# Altium PCB PCB3.PcbDoc (part 1 of 4)
Units mm, origin at the board's own origin, x right, y up, seen from the top; angles counter-clockwise.
Board outline 130 x 71 mm, 4 copper layers (Top Layer, Mid Layer 1, Mid Layer 2, Bottom Layer), stack 1.57 mm thick; 325 components, 359 nets, 1545 pads, 1046 vias.
Unrouted connection lines stored in the file: 158.
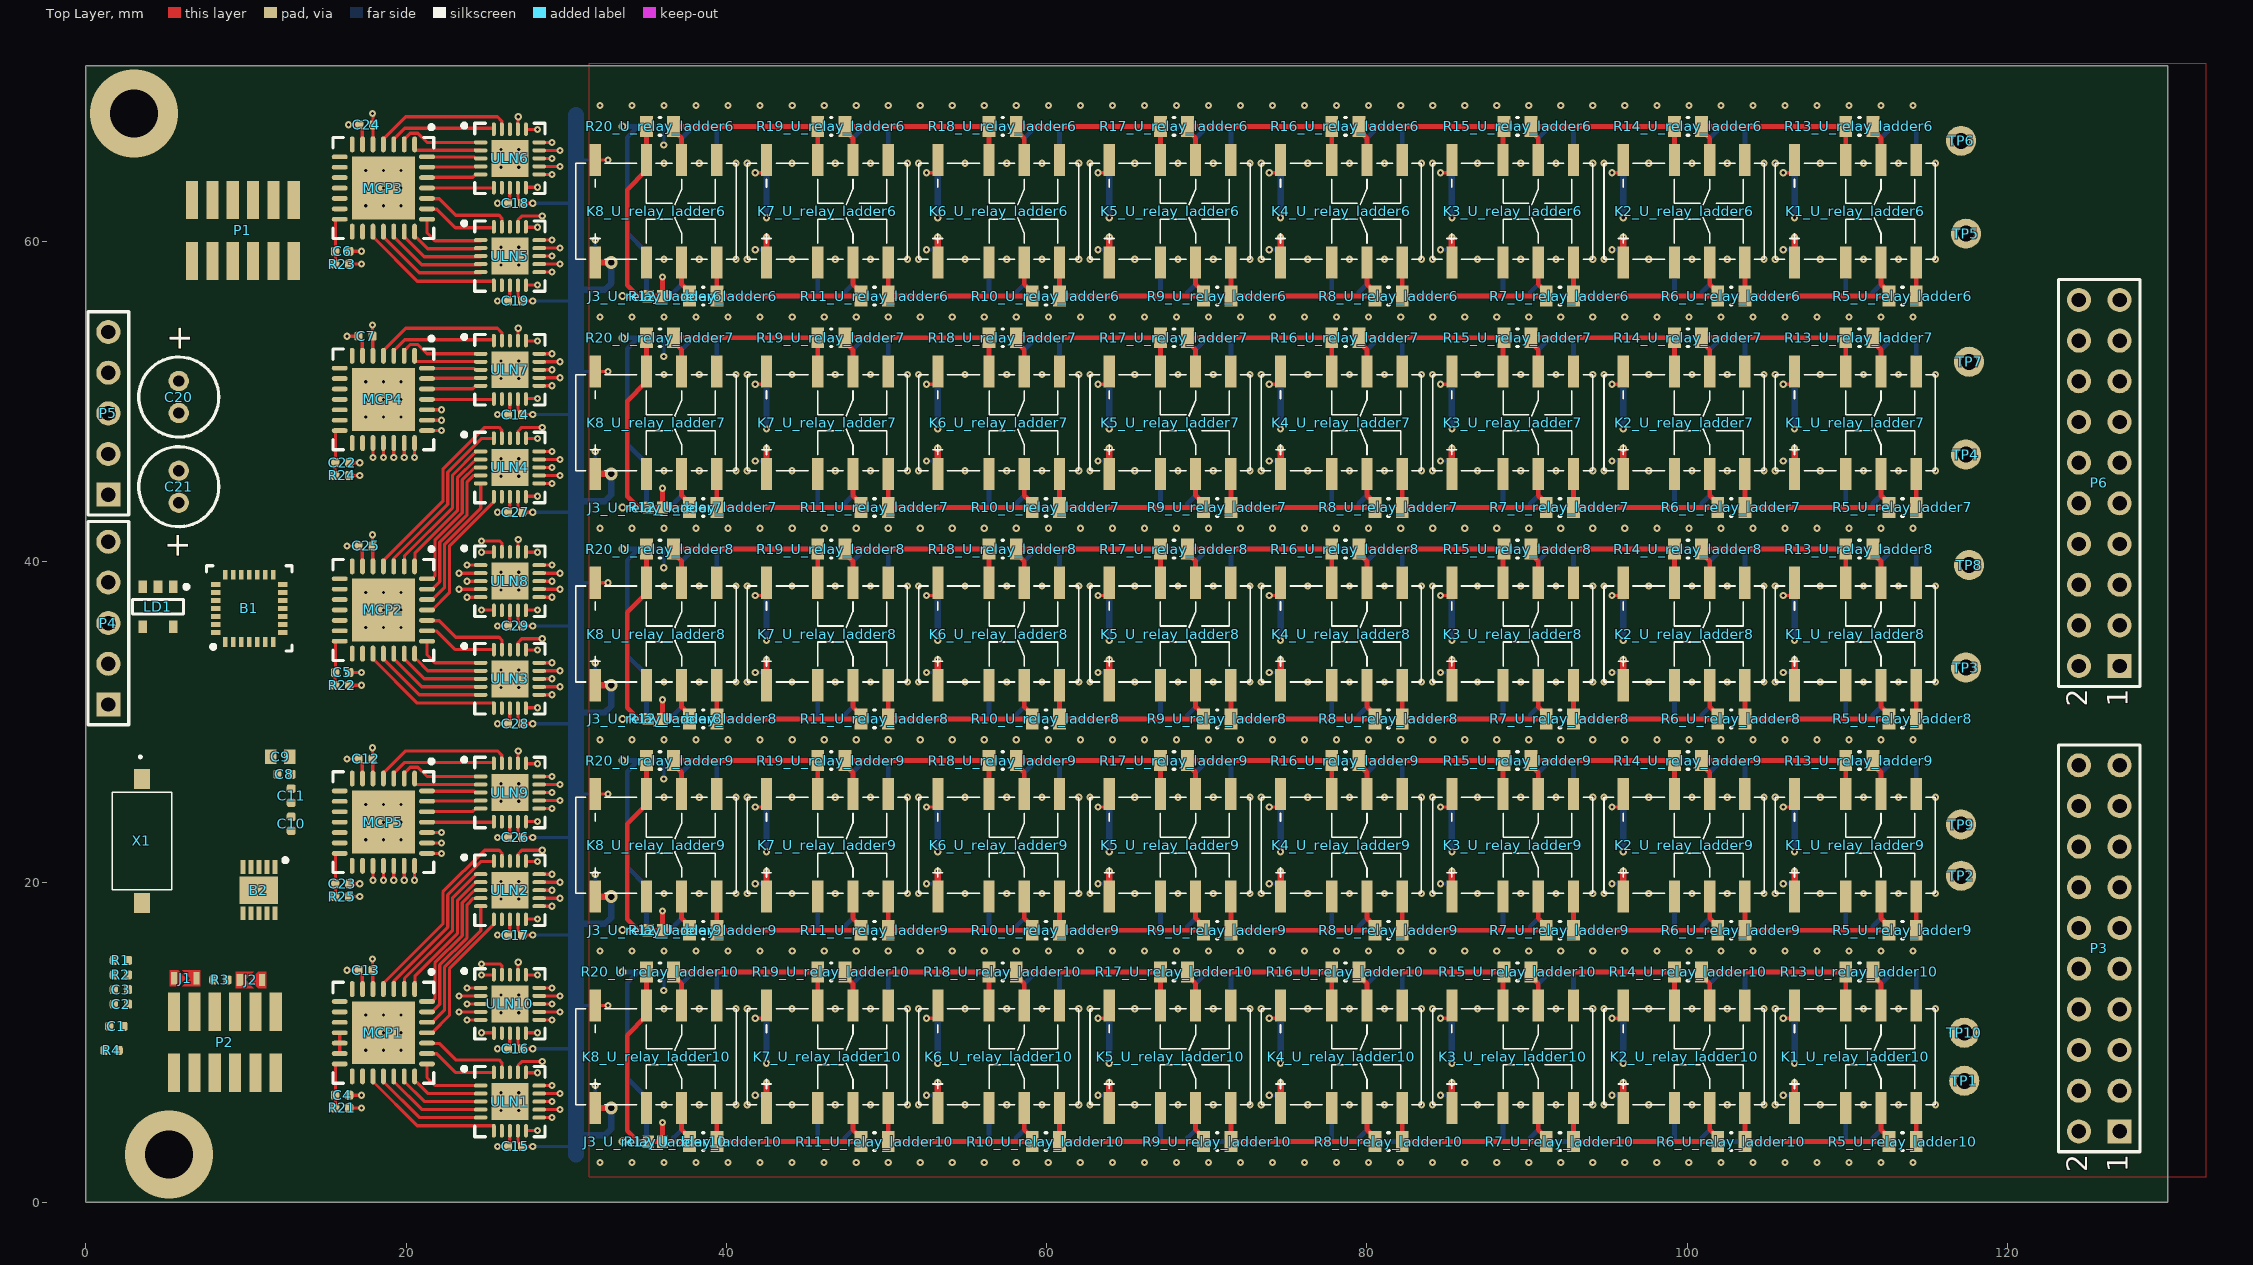
[diagram p0: Top Layer view]
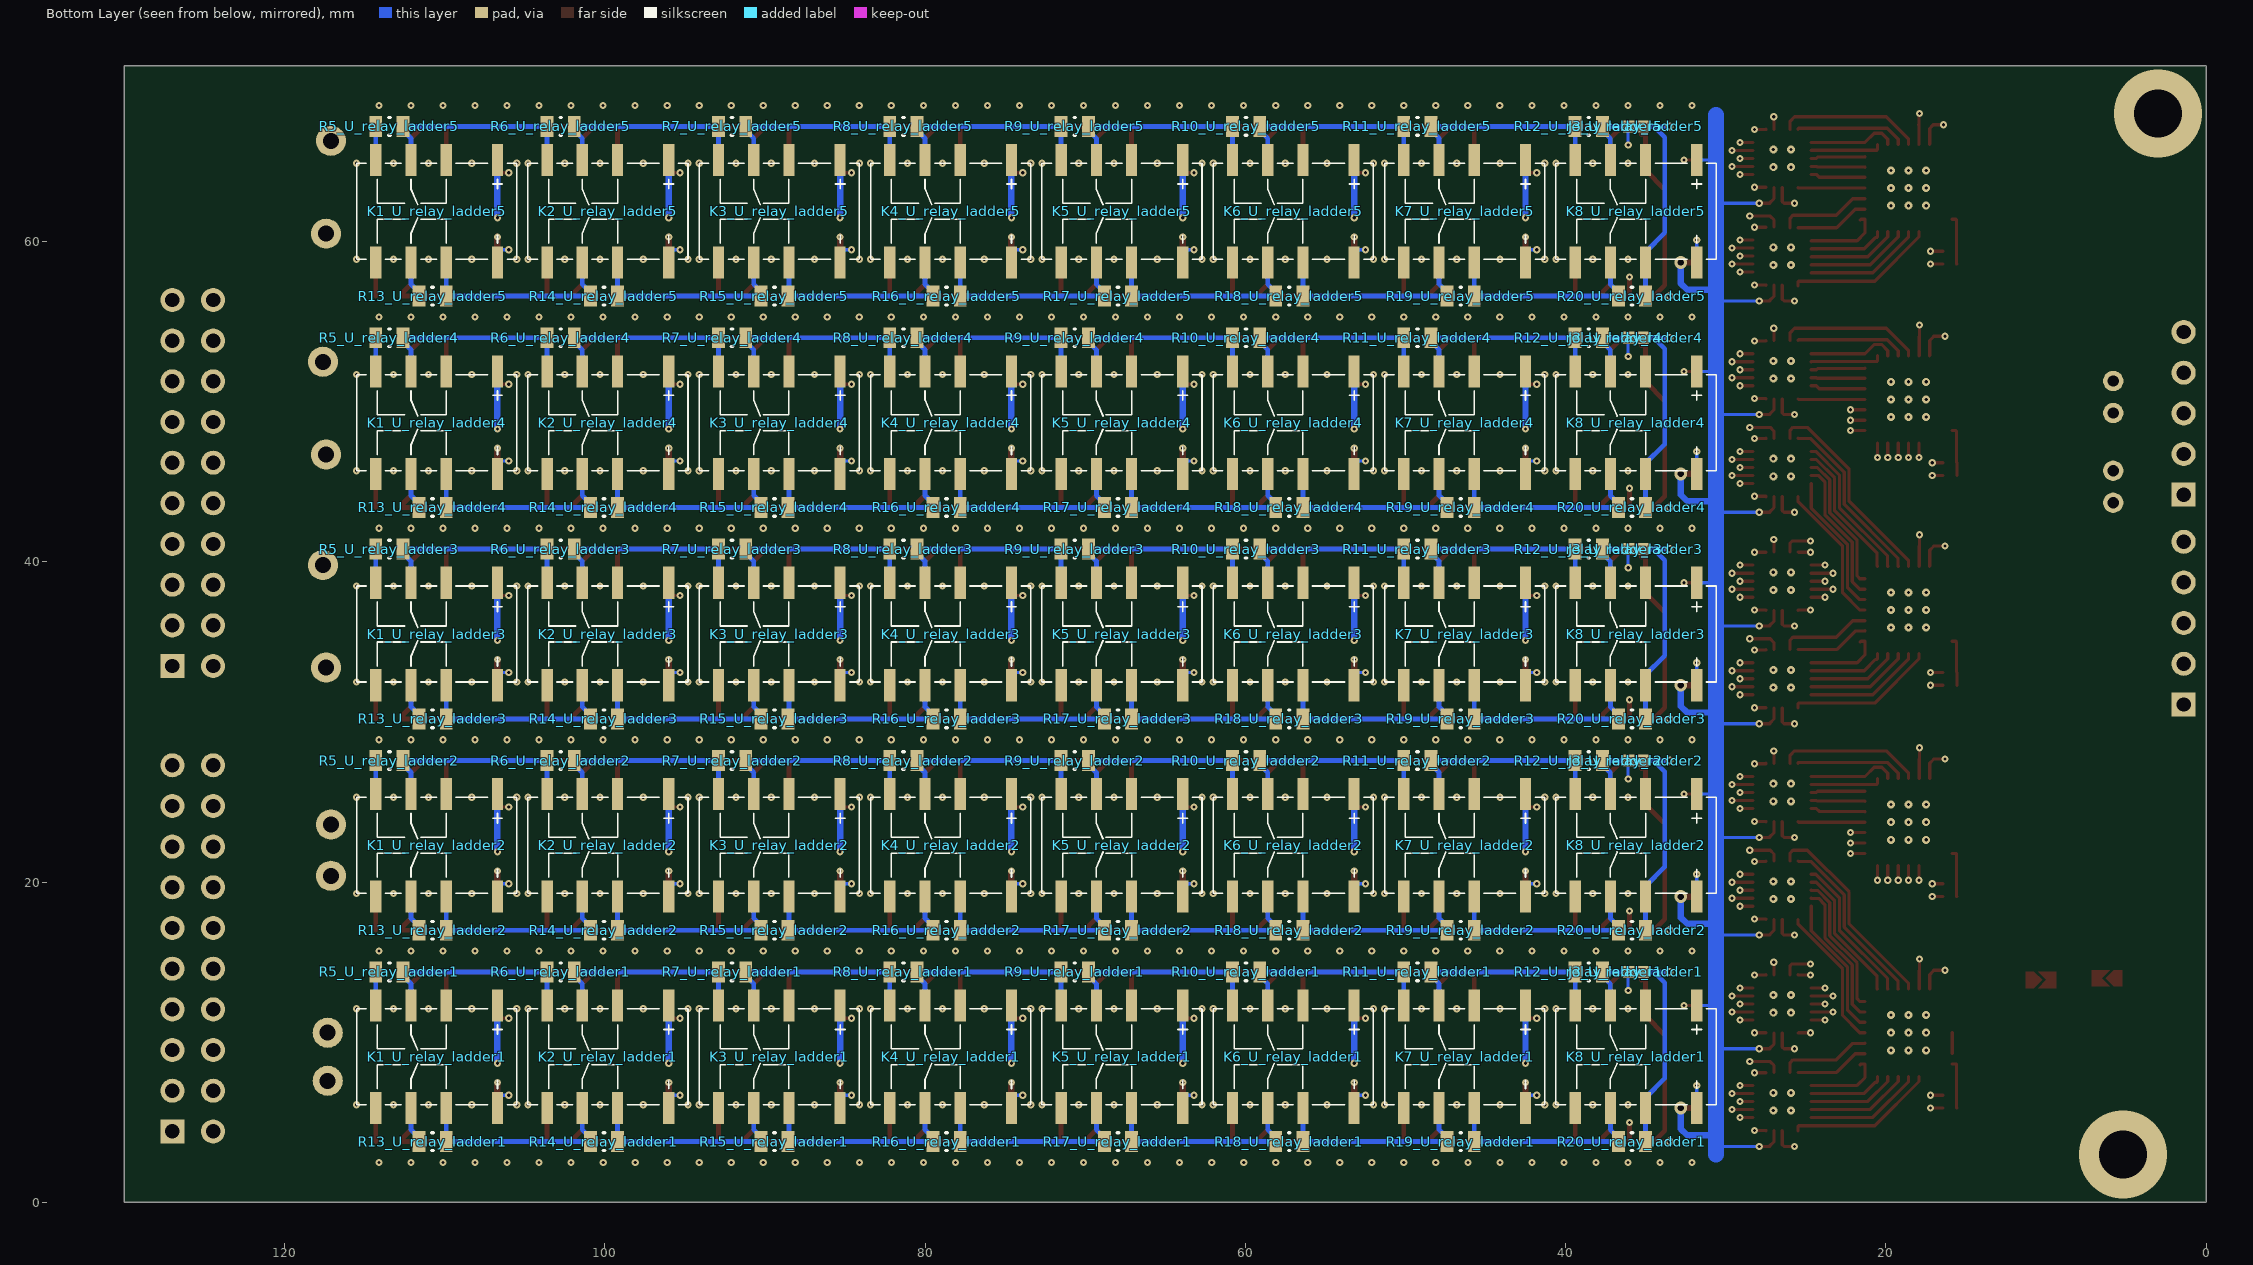
[diagram p1: Bottom Layer view, seen from below]
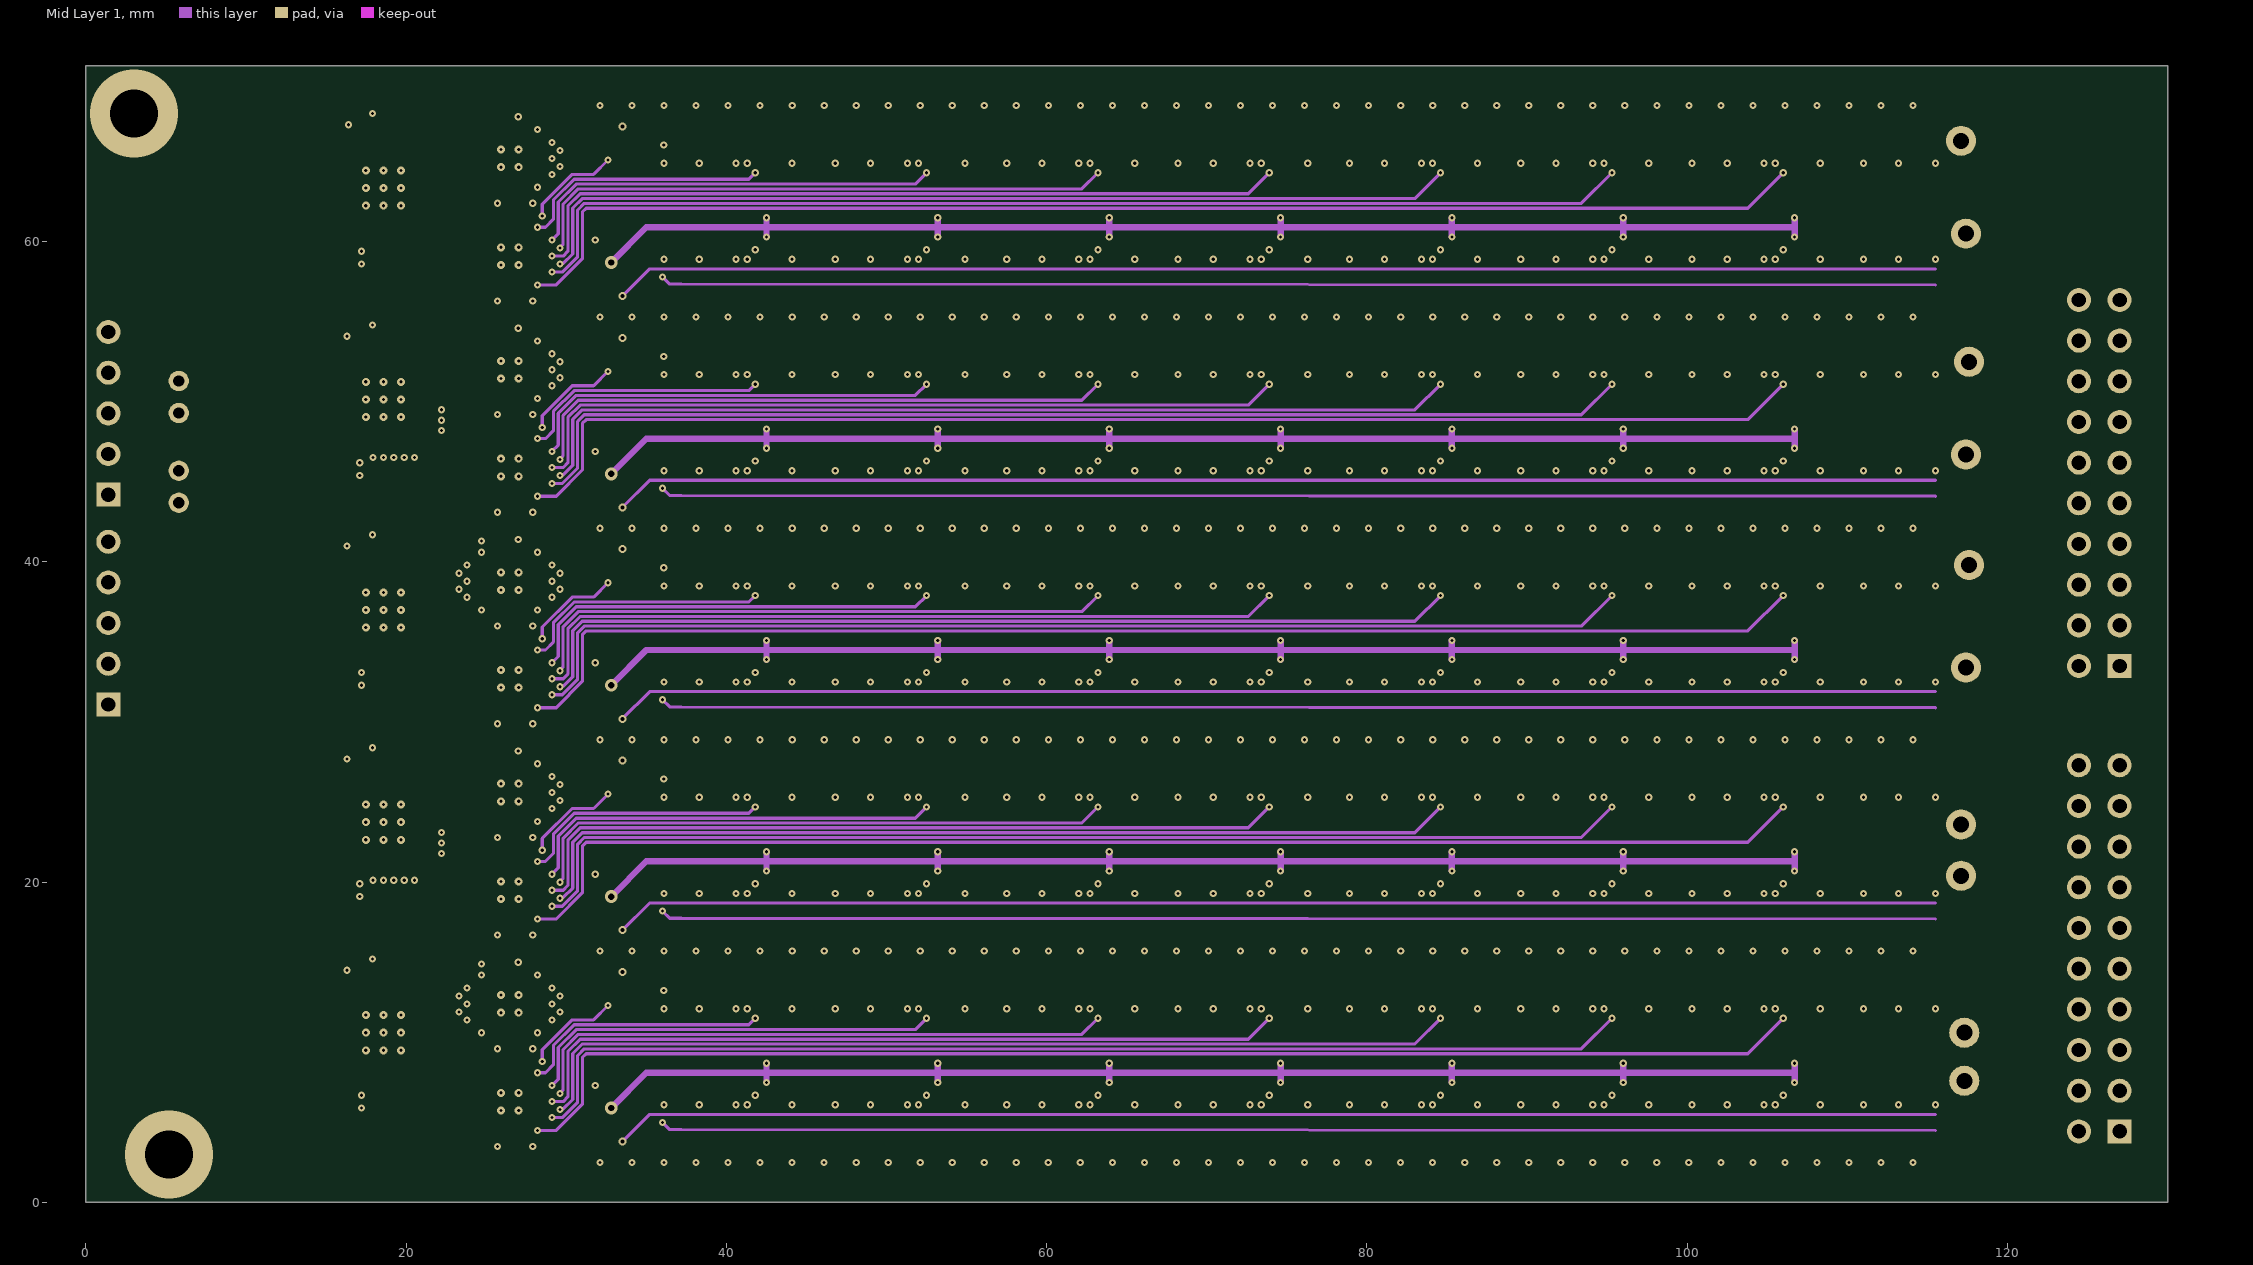
[diagram p2: Mid Layer 1]
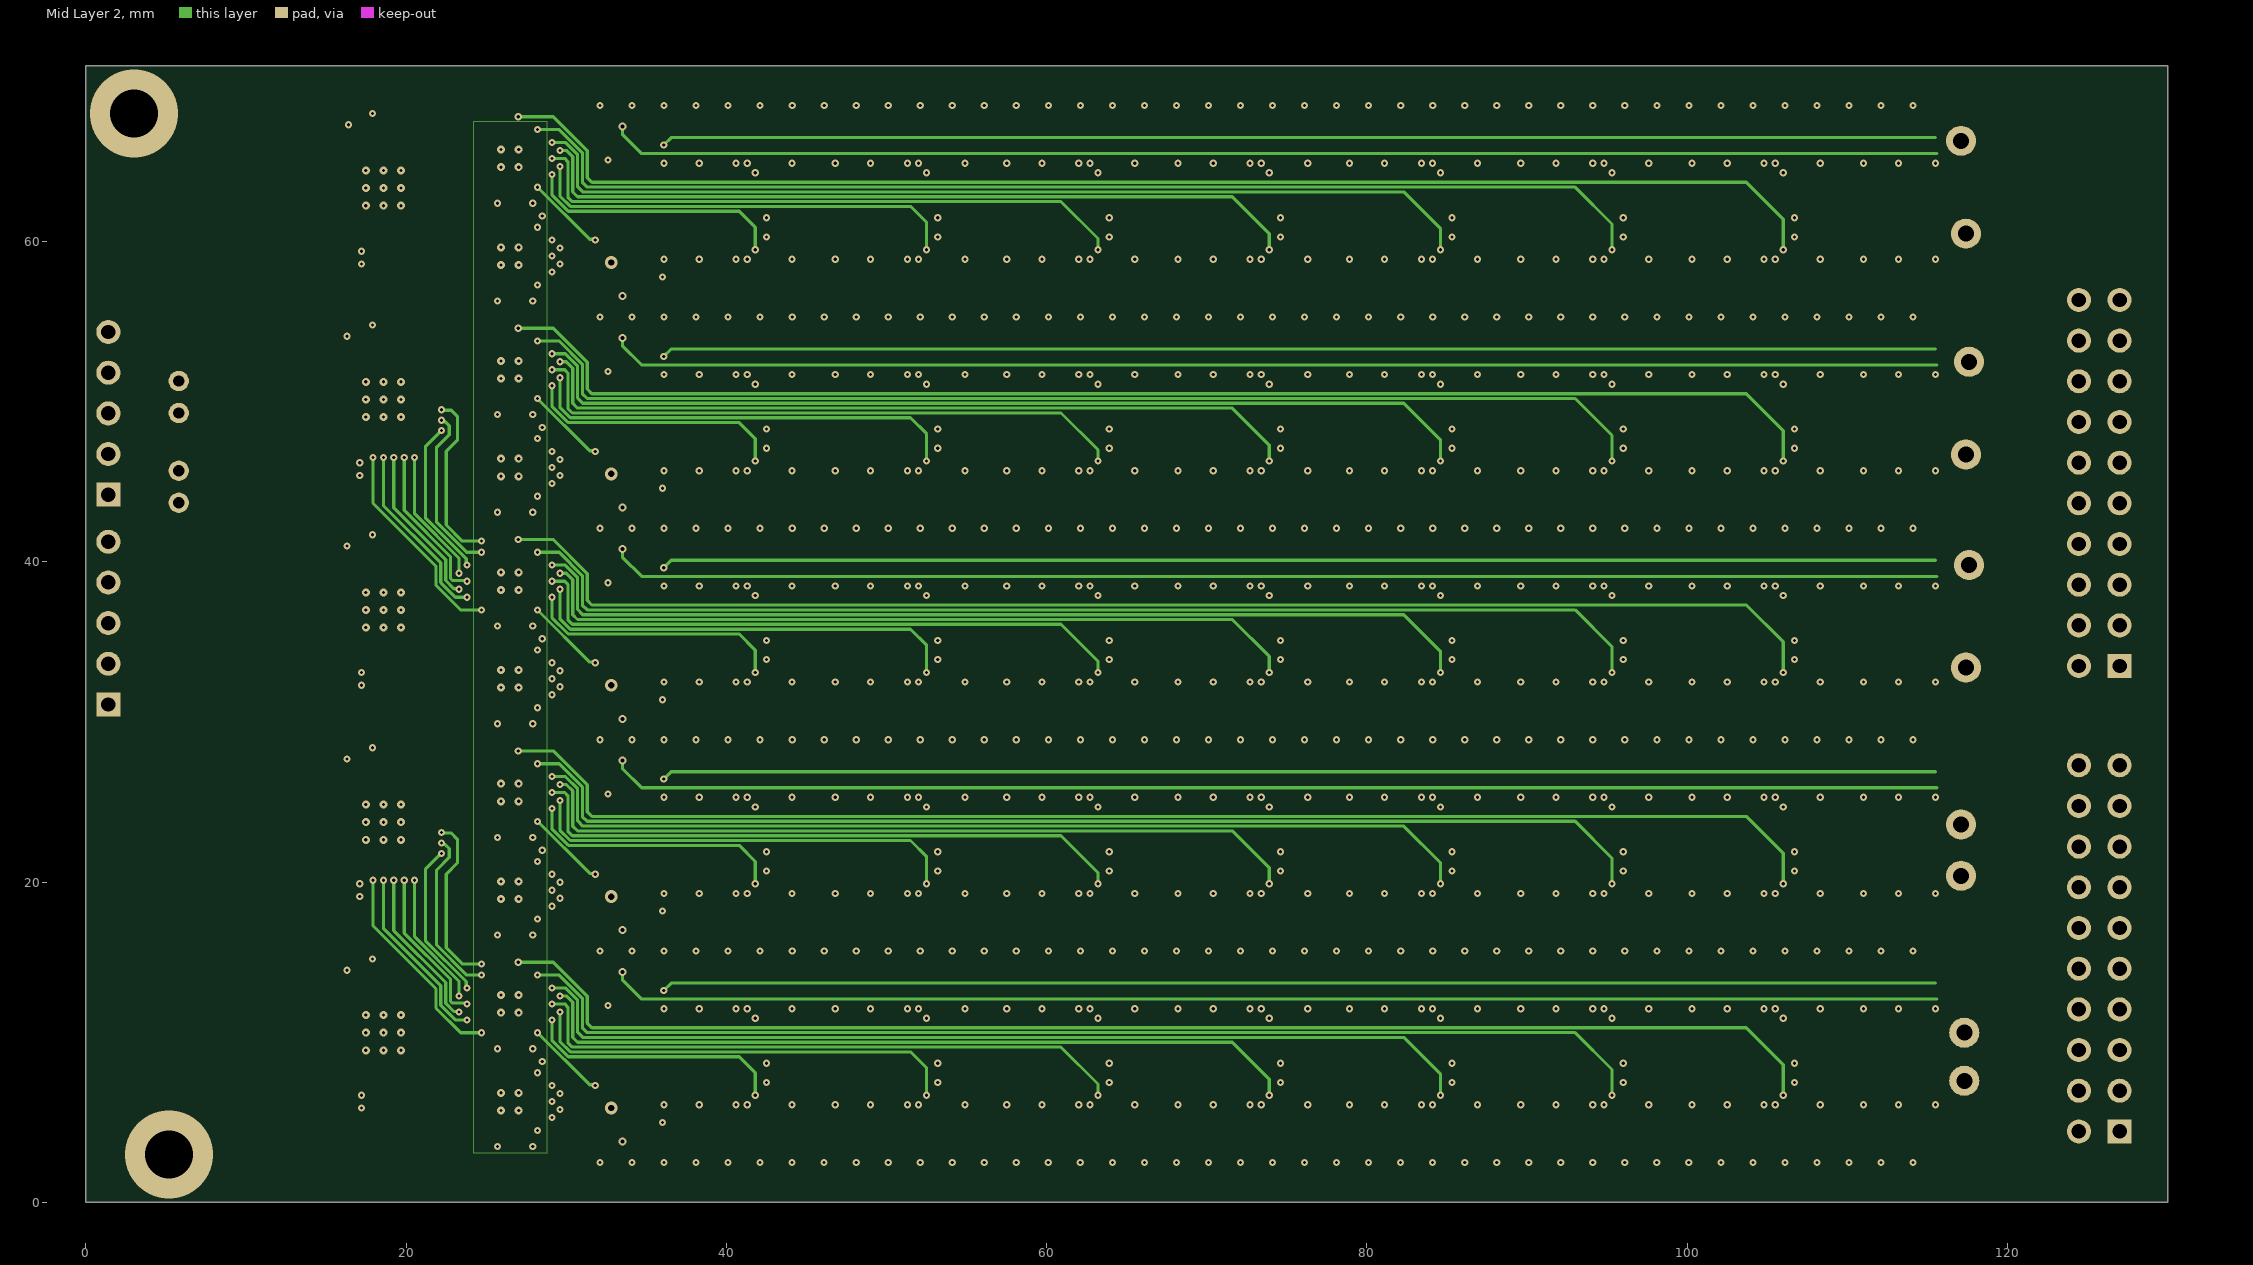
[diagram p3: Mid Layer 2]
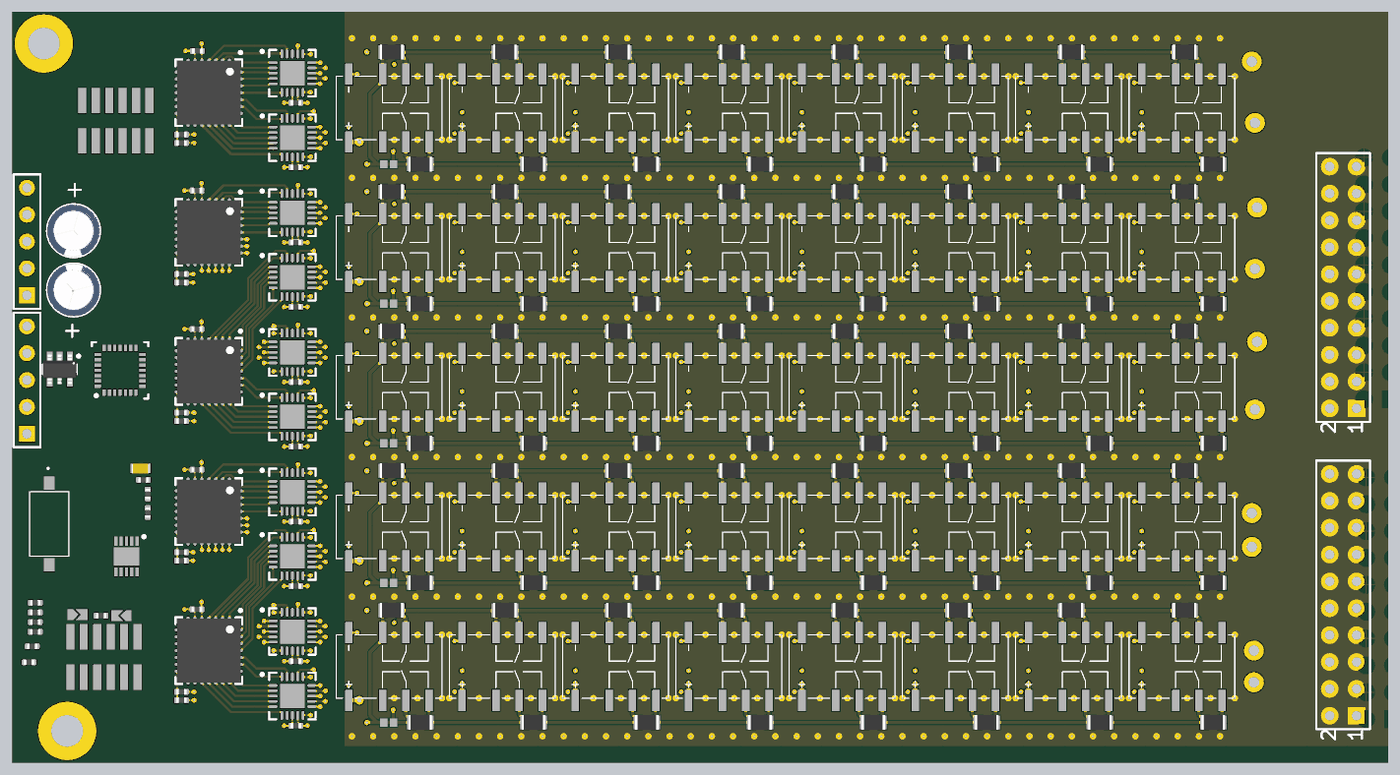
[diagram p7: 3D render of the assembled board from above, using the file's embedded part models]
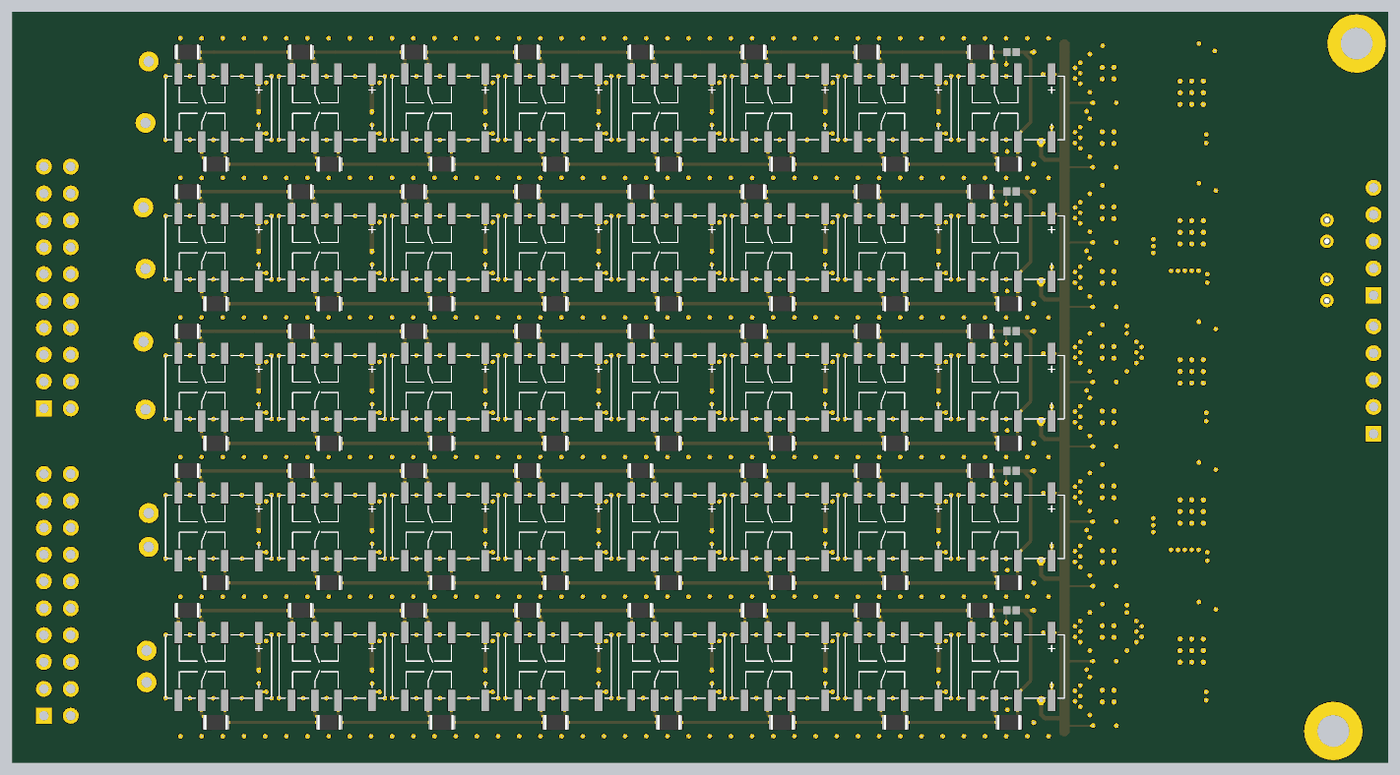
[diagram p8: 3D render of the assembled board from below, using the file's embedded part models]

## Layer stack, top to bottom
Top Solder: solder mask 0.0127, Solder Resist, Dk 3.8
Top Layer: signal copper 0.035
Dielectric 1: prepreg 0.2, 7628, Dk 4.6
Mid Layer 1: signal copper 0.0175
Core: core 1.065, FR-4, Dk 4.5
Mid Layer 2: signal copper 0.0175
Dielectric 2: prepreg 0.2, 7628, Dk 4.6
Bottom Layer: signal copper 0.035
Bottom Solder: solder mask 0.0127, Solder Resist, Dk 3.8

## Board outline
0,0 130,0 130,71 0,71

## Design rules (kind name [scope] priority, off if disabled: settings)
BoardOutlineClearance [All] p1: gap=0.2 ignorepadtopadclearanceinfootprint=FALSE
Clearance [All] p1: gap=0.102 ignorepadtopadclearanceinfootprint=FALSE except(0.127: Arc-Via Track-Via SMDPad-Via THPad-Via Via-Via Via-Fill Via-Poly Via-Region Via-Text; 0.25: Arc-Hole Track-Hole SMDPad-Hole THPad-Hole Via-Hole Fill-Hole Poly-Hole Region-Hole Text-Hole)
ComponentClearance [All] p1: gap=0.102 collisioncheckmode=3 verticalgap=0.102 showdistances=TRUE
DiffPairsRouting [All] p1: maxlimit=0.102 minlimit=0.102 mostfreqgap=0.102 toplayer_minwidth=0.102 toplayer_maxwidth=1816.048 toplayer_prefwidth=0.102 midlayer1_minwidth=0.102 midlayer1_maxwidth=1816.048 midlayer1_prefwidth=0.102 midlayer2_minwidth=0.102 midlayer2_maxwidth=1816.048 midlayer2_prefwidth=0.102 bottomlayer_minwidth=0.102 bottomlayer_maxwidth=1816.048 bottomlayer_prefwidth=0.102 maxuncoupledlength=12.7
Height [All] p1: minheight=0 maxheight=1816.048 prefheight=12.7
HoleSize [All] p1: absolutevalues=TRUE maxlimit=6.3 minlimit=0.2 maxpercent=80.000 minpercent=20.000
HoleToHoleClearance [All] p1: gap=0.25 allowstackedmicrovias=FALSE
MinimumAnnularRing [All] p1: minimumring=0.076
MinimumSolderMaskSliver [All] p1: minsoldermaskwidth=0
PlaneClearance [All] p1: clearance=0.102
PlaneConnect PlaneConnectPowerPads [InPadClass('PowerPads')] p1: planeconnectstyle=Direct reliefexpansion=0.508 reliefentries=4 reliefconductorwidth=0.254 reliefairgap=0.254
PlaneConnect [All] p2: pad.planeconnectstyle=Relief pad.reliefexpansion=0.3 pad.reliefentries=4 pad.reliefconductorwidth=0.102 pad.reliefairgap=0.102 via.planeconnectstyle=Direct via.reliefexpansion=0.3 via.reliefentries=4 via.reliefconductorwidth=0.127 via.reliefairgap=0.127
PolygonConnect PolygonConnectPowerPads [All vs (InPadClass('PowerPads'))] p1: connectstyle=Direct reliefconductorwidth=0.254 reliefentries=4 polygonreliefangle="90 Angle" airgapwidth=0.254
PolygonConnect [All] p2: thpad.connectstyle=Relief thpad.reliefconductorwidth=0.102 thpad.reliefentries=4 thpad.polygonreliefangle="90 Angle" thpad.airgapwidth=0.102 smdpad.connectstyle=Relief smdpad.reliefconductorwidth=0.102 smdpad.reliefentries=4 smdpad.polygonreliefangle="90 Angle" smdpad.airgapwidth=0.102 via.connectstyle=Direct via.reliefconductorwidth=0.127 via.reliefentries=4 via.polygonreliefangle="90 Angle" via.airgapwidth=0.127
RoomDefinition U_relay_ladder1 [InComponentClass('U_relay_ladder1')] p1: confinementstyle=ConfineIn formatcopy=FALSE lockcomponents=FALSE outline 22.2,15.7 118.6,15.7 118.6,2.5 22.2,2.5
RoomDefinition U_relay_ladder6 [InComponentClass('U_relay_ladder6')] p2: confinementstyle=ConfineIn formatcopy=TRUE lockcomponents=FALSE outline 22.2,55.3 118.6,55.3 118.6,68.5 22.2,68.5
RoomDefinition U_relay_ladder2 [InComponentClass('U_relay_ladder2')] p3: confinementstyle=ConfineIn formatcopy=FALSE lockcomponents=FALSE outline 22.2,28.9 118.6,28.9 118.6,15.7 22.2,15.7
RoomDefinition U_relay_ladder4 [InComponentClass('U_relay_ladder4')] p4: confinementstyle=ConfineIn formatcopy=FALSE lockcomponents=FALSE outline 22.2,55.3 118.6,55.3 118.6,42.1 22.2,42.1
RoomDefinition U_relay_ladder3 [InComponentClass('U_relay_ladder3')] p5: confinementstyle=ConfineIn formatcopy=FALSE lockcomponents=FALSE outline 22.2,42.1 118.6,42.1 118.6,28.9 22.2,28.9
RoomDefinition U_relay_ladder5 [InComponentClass('U_relay_ladder5')] p6: confinementstyle=ConfineIn formatcopy=FALSE lockcomponents=TRUE outline 22.2,68.5 118.6,68.5 118.6,55.3 22.2,55.3
RoomDefinition U_relay_ladder8 [InComponentClass('U_relay_ladder8')] p7: confinementstyle=ConfineIn formatcopy=TRUE lockcomponents=FALSE outline 22.2,28.9 118.6,28.9 118.6,42.1 22.2,42.1
RoomDefinition U_relay_ladder7 [InComponentClass('U_relay_ladder7')] p8: confinementstyle=ConfineIn formatcopy=TRUE lockcomponents=FALSE outline 22.2,42.1 118.6,42.1 118.6,55.3 22.2,55.3
RoomDefinition U_relay_ladder9 [InComponentClass('U_relay_ladder9')] p9: confinementstyle=ConfineIn formatcopy=TRUE lockcomponents=FALSE outline 22.2,15.7 118.6,15.7 118.6,28.9 22.2,28.9
RoomDefinition U_relay_ladder10 [InComponentClass('U_relay_ladder10')] p10: confinementstyle=ConfineIn formatcopy=TRUE lockcomponents=FALSE outline 22.2,2.5 118.6,2.5 118.6,15.7 22.2,15.7
RoomDefinition U_relay_driver [InComponentClass('U_relay_driver')] p11: confinementstyle=ConfineIn formatcopy=TRUE lockcomponents=FALSE outline 130,0 130,71 14.9,71 14.9,0
RoomDefinition U_Power [InComponentClass('U_Power')] p12: confinementstyle=ConfineIn formatcopy=TRUE lockcomponents=FALSE outline 14.869,14.631 14.869,65.431 0,65.431 0,14.631
RoomDefinition U_MCU [InComponentClass('U_MCU')] p13: confinementstyle=ConfineIn formatcopy=TRUE lockcomponents=FALSE outline 14.9,0 14.9,71 0,71 0,0
RoutingVias [All] p1: holewidth=0.2 width=0.45 viastyle="Through Hole" minholewidth=0.2 minwidth=0.45 maxholewidth=6.3 maxwidth=6.55
SilkToSilkClearance [All] p1: silktosilkclearance=0
SilkToSolderMaskClearance [IsPad] p1: minsilkscreentomaskgap=0.102 clearancetoexposedcopper=TRUE
SolderMaskExpansion [All] p1: expansion=0.075 istentingtop=FALSE
Width [All] p1: maxlimit=1816.048 minlimit=0.102 preferedwidth=0.102
20 further rules are at their usual default settings.

## Classes and differential pairs
channel class relay_ladder: U_relay_ladder1 U_relay_ladder2 U_relay_ladder3 U_relay_ladder4 U_relay_ladder5 U_relay_ladder6 U_relay_ladder7 U_relay_ladder8 U_relay_ladder9 U_relay_ladder10
component class U_relay_ladder10: J3_U_relay_ladder10 K1_U_relay_ladder10 K2_U_relay_ladder10 K3_U_relay_ladder10 K4_U_relay_ladder10 K5_U_relay_ladder10 K6_U_relay_ladder10 K7_U_relay_ladder10 K8_U_relay_ladder10 R5_U_relay_ladder10 R6_U_relay_ladder10 R7_U_relay_ladder10 R8_U_relay_ladder10 R9_U_relay_ladder10 R10_U_relay_ladder10 R11_U_relay_ladder10 R12_U_relay_ladder10 R13_U_relay_ladder10 R14_U_relay_ladder10 R15_U_relay_ladder10 R16_U_relay_ladder10 R17_U_relay_ladder10 R18_U_relay_ladder10 R19_U_relay_ladder10 R20_U_relay_ladder10
component class U_relay_ladder9: J3_U_relay_ladder9 K1_U_relay_ladder9 K2_U_relay_ladder9 K3_U_relay_ladder9 K4_U_relay_ladder9 K5_U_relay_ladder9 K6_U_relay_ladder9 K7_U_relay_ladder9 K8_U_relay_ladder9 R5_U_relay_ladder9 R6_U_relay_ladder9 R7_U_relay_ladder9 R8_U_relay_ladder9 R9_U_relay_ladder9 R10_U_relay_ladder9 R11_U_relay_ladder9 R12_U_relay_ladder9 R13_U_relay_ladder9 R14_U_relay_ladder9 R15_U_relay_ladder9 R16_U_relay_ladder9 R17_U_relay_ladder9 R18_U_relay_ladder9 R19_U_relay_ladder9 R20_U_relay_ladder9
component class U_relay_ladder8: J3_U_relay_ladder8 K1_U_relay_ladder8 K2_U_relay_ladder8 K3_U_relay_ladder8 K4_U_relay_ladder8 K5_U_relay_ladder8 K6_U_relay_ladder8 K7_U_relay_ladder8 K8_U_relay_ladder8 R5_U_relay_ladder8 R6_U_relay_ladder8 R7_U_relay_ladder8 R8_U_relay_ladder8 R9_U_relay_ladder8 R10_U_relay_ladder8 R11_U_relay_ladder8 R12_U_relay_ladder8 R13_U_relay_ladder8 R14_U_relay_ladder8 R15_U_relay_ladder8 R16_U_relay_ladder8 R17_U_relay_ladder8 R18_U_relay_ladder8 R19_U_relay_ladder8 R20_U_relay_ladder8
component class U_relay_ladder7: J3_U_relay_ladder7 K1_U_relay_ladder7 K2_U_relay_ladder7 K3_U_relay_ladder7 K4_U_relay_ladder7 K5_U_relay_ladder7 K6_U_relay_ladder7 K7_U_relay_ladder7 K8_U_relay_ladder7 R5_U_relay_ladder7 R6_U_relay_ladder7 R7_U_relay_ladder7 R8_U_relay_ladder7 R9_U_relay_ladder7 R10_U_relay_ladder7 R11_U_relay_ladder7 R12_U_relay_ladder7 R13_U_relay_ladder7 R14_U_relay_ladder7 R15_U_relay_ladder7 R16_U_relay_ladder7 R17_U_relay_ladder7 R18_U_relay_ladder7 R19_U_relay_ladder7 R20_U_relay_ladder7
component class U_relay_ladder6: J3_U_relay_ladder6 K1_U_relay_ladder6 K2_U_relay_ladder6 K3_U_relay_ladder6 K4_U_relay_ladder6 K5_U_relay_ladder6 K6_U_relay_ladder6 K7_U_relay_ladder6 K8_U_relay_ladder6 R5_U_relay_ladder6 R6_U_relay_ladder6 R7_U_relay_ladder6 R8_U_relay_ladder6 R9_U_relay_ladder6 R10_U_relay_ladder6 R11_U_relay_ladder6 R12_U_relay_ladder6 R13_U_relay_ladder6 R14_U_relay_ladder6 R15_U_relay_ladder6 R16_U_relay_ladder6 R17_U_relay_ladder6 R18_U_relay_ladder6 R19_U_relay_ladder6 R20_U_relay_ladder6
component class U_relay_ladder5: J3_U_relay_ladder5 K1_U_relay_ladder5 K2_U_relay_ladder5 K3_U_relay_ladder5 K4_U_relay_ladder5 K5_U_relay_ladder5 K6_U_relay_ladder5 K7_U_relay_ladder5 K8_U_relay_ladder5 R5_U_relay_ladder5 R6_U_relay_ladder5 R7_U_relay_ladder5 R8_U_relay_ladder5 R9_U_relay_ladder5 R10_U_relay_ladder5 R11_U_relay_ladder5 R12_U_relay_ladder5 R13_U_relay_ladder5 R14_U_relay_ladder5 R15_U_relay_ladder5 R16_U_relay_ladder5 R17_U_relay_ladder5 R18_U_relay_ladder5 R19_U_relay_ladder5 R20_U_relay_ladder5
component class U_relay_ladder4: J3_U_relay_ladder4 K1_U_relay_ladder4 K2_U_relay_ladder4 K3_U_relay_ladder4 K4_U_relay_ladder4 K5_U_relay_ladder4 K6_U_relay_ladder4 K7_U_relay_ladder4 K8_U_relay_ladder4 R5_U_relay_ladder4 R6_U_relay_ladder4 R7_U_relay_ladder4 R8_U_relay_ladder4 R9_U_relay_ladder4 R10_U_relay_ladder4 R11_U_relay_ladder4 R12_U_relay_ladder4 R13_U_relay_ladder4 R14_U_relay_ladder4 R15_U_relay_ladder4 R16_U_relay_ladder4 R17_U_relay_ladder4 R18_U_relay_ladder4 R19_U_relay_ladder4 R20_U_relay_ladder4
component class U_relay_ladder3: J3_U_relay_ladder3 K1_U_relay_ladder3 K2_U_relay_ladder3 K3_U_relay_ladder3 K4_U_relay_ladder3 K5_U_relay_ladder3 K6_U_relay_ladder3 K7_U_relay_ladder3 K8_U_relay_ladder3 R5_U_relay_ladder3 R6_U_relay_ladder3 R7_U_relay_ladder3 R8_U_relay_ladder3 R9_U_relay_ladder3 R10_U_relay_ladder3 R11_U_relay_ladder3 R12_U_relay_ladder3 R13_U_relay_ladder3 R14_U_relay_ladder3 R15_U_relay_ladder3 R16_U_relay_ladder3 R17_U_relay_ladder3 R18_U_relay_ladder3 R19_U_relay_ladder3 R20_U_relay_ladder3
component class U_relay_ladder2: J3_U_relay_ladder2 K1_U_relay_ladder2 K2_U_relay_ladder2 K3_U_relay_ladder2 K4_U_relay_ladder2 K5_U_relay_ladder2 K6_U_relay_ladder2 K7_U_relay_ladder2 K8_U_relay_ladder2 R5_U_relay_ladder2 R6_U_relay_ladder2 R7_U_relay_ladder2 R8_U_relay_ladder2 R9_U_relay_ladder2 R10_U_relay_ladder2 R11_U_relay_ladder2 R12_U_relay_ladder2 R13_U_relay_ladder2 R14_U_relay_ladder2 R15_U_relay_ladder2 R16_U_relay_ladder2 R17_U_relay_ladder2 R18_U_relay_ladder2 R19_U_relay_ladder2 R20_U_relay_ladder2
component class U_relay_ladder1: J3_U_relay_ladder1 K1_U_relay_ladder1 K2_U_relay_ladder1 K3_U_relay_ladder1 K4_U_relay_ladder1 K5_U_relay_ladder1 K6_U_relay_ladder1 K7_U_relay_ladder1 K8_U_relay_ladder1 R5_U_relay_ladder1 R6_U_relay_ladder1 R7_U_relay_ladder1 R8_U_relay_ladder1 R9_U_relay_ladder1 R10_U_relay_ladder1 R11_U_relay_ladder1 R12_U_relay_ladder1 R13_U_relay_ladder1 R14_U_relay_ladder1 R15_U_relay_ladder1 R16_U_relay_ladder1 R17_U_relay_ladder1 R18_U_relay_ladder1 R19_U_relay_ladder1 R20_U_relay_ladder1
component class U_relay_driver: C4 C5 C6 C7 C12 C13 C14 C15 C16 C17 C18 C19 C22 C23 C24 C25 C26 C27 C28 C29 MCP1 MCP2 MCP3 MCP4 MCP5 P3 P6 R21 R22 R23 R24 R25 TP1 TP2 TP3 TP4 TP5 TP6 TP7 TP8 TP9 TP10 ULN1 ULN2 ULN3 ULN4 ULN5 ULN6 ULN7 ULN8 ULN9 ULN10
component class U_Power: C8 C9 C10 C11 C20 C21 LD1 P4 P5
component class U_MCU: B1 B2 C1 C2 C3 J1 J2 P1 P2 R1 R2 R3 R4 X1

## Components (designator, comment, footprint, x,y, rotation, side; value= is the part's Value field where it differs from the comment)
B1 "STM32C031G6U6" QFN50P400X400X60-28N-D 10.2,37.1 r90 top
B2 "XR33202EEHBTR-F" SON50P300X300X80-11N-D 10.8,19.5 r270 top
C1 "100n" R1005_0402i_L 1.9,11 r0 top
C2 "100n" R1005_0402i_L 2.187,12.381 r0 top
C3 "100n" R1005_0402i_L 2.187,13.295 r0 top
C4 "100n" R1005_0402i_L 16,6.7 r180 top
C5 "100n" R1005_0402i_L 16,33.1 r180 top
C6 "100n" R1005_0402i_L 16,59.4 r180 top
C7 "100n" R1005_0402i_L 17.46,54.1 r0 top
C8 "100n" R1005_0402i_L 12.4,26.739 r0 top
C9 "22u" C1608_0603I_L 12.14,27.822 r0 top
C10 "1u" R1005_0402i_L 12.82,23.652 r90 top
C11 "100n" R1005_0402i_L 12.82,25.405 r90 top
C12 "100n" R1005_0402i_L 17.46,27.7 r0 top
C13 "100n" R1005_0402i_L 17.46,14.5 r0 top
C14 "100n" R1005_0402i_L 26.8,49.2 r180 top
C15 "100n" R1005_0402i_L 26.8,3.5 r180 top
C16 "100n" R1005_0402i_L 26.8,9.6 r180 top
C17 "100n" R1005_0402i_L 26.8,16.7 r180 top
C18 "100n" R1005_0402i_L 26.8,62.4 r180 top
C19 "100n" R1005_0402i_L 26.8,56.3 r180 top
C20 "C+" "C AlElko 5x11 R2" 5.8,50.3 r90 top
C21 "C+" "C AlElko 5x11 R2" 5.8,44.7 r270 top
C22 "100n" R1005_0402i_L 16,46.2 r180 top
C23 "100n" R1005_0402i_L 16,19.9 r180 top
C24 "100n" R1005_0402i_L 17.5,67.3 r0 top
C25 "100n" R1005_0402i_L 17.46,41 r0 top
C26 "100n" R1005_0402i_L 26.8,22.8 r180 top
C27 "100n" R1005_0402i_L 26.8,43.1 r180 top
C28 "100n" R1005_0402i_L 26.8,29.9 r180 top
C29 "100n" R1005_0402i_L 26.8,36 r180 top
J1 "solder_jumper" SOLDER_JUMPER_TRIANGLE 6.643,14.508 r180 top
J2 "solder_jumper" SOLDER_JUMPER_TRIANGLE 9.857,13.392 r0 top
J3_U_relay_ladder1 "solder_jumper" SOLDER_JUMPER_SQUARE 35.603,14.4 r180 bottom (schematic designator J3)
J3_U_relay_ladder2 "solder_jumper" SOLDER_JUMPER_SQUARE 35.603,27.6 r180 bottom (schematic designator J3)
J3_U_relay_ladder3 "solder_jumper" SOLDER_JUMPER_SQUARE 35.603,40.8 r180 bottom (schematic designator J3)
J3_U_relay_ladder4 "solder_jumper" SOLDER_JUMPER_SQUARE 35.603,54 r180 bottom (schematic designator J3)
J3_U_relay_ladder5 "solder_jumper" SOLDER_JUMPER_SQUARE 35.603,67.2 r180 bottom (schematic designator J3)
J3_U_relay_ladder6 "solder_jumper" SOLDER_JUMPER_SQUARE 35.561,56.597 r0 top (schematic designator J3)
J3_U_relay_ladder7 "solder_jumper" SOLDER_JUMPER_SQUARE 35.561,43.397 r0 top (schematic designator J3)
J3_U_relay_ladder8 "solder_jumper" SOLDER_JUMPER_SQUARE 35.561,30.197 r0 top (schematic designator J3)
J3_U_relay_ladder9 "solder_jumper" SOLDER_JUMPER_SQUARE 35.561,16.997 r0 top (schematic designator J3)
J3_U_relay_ladder10 "solder_jumper" SOLDER_JUMPER_SQUARE 35.561,3.797 r0 top (schematic designator J3)
K1_U_relay_ladder1 "DPDT" "AXICOM IM-G RELAY" 110.5,9.1 r0 bottom (schematic designator K1)
K1_U_relay_ladder2 "DPDT" "AXICOM IM-G RELAY" 110.5,22.3 r0 bottom (schematic designator K1)
K1_U_relay_ladder3 "DPDT" "AXICOM IM-G RELAY" 110.5,35.5 r0 bottom (schematic designator K1)
K1_U_relay_ladder4 "DPDT" "AXICOM IM-G RELAY" 110.5,48.7 r0 bottom (schematic designator K1)
K1_U_relay_ladder5 "DPDT" "AXICOM IM-G RELAY" 110.5,61.9 r0 bottom (schematic designator K1)
K1_U_relay_ladder6 "DPDT" "AXICOM IM-G RELAY" 110.5,61.9 r0 top (schematic designator K1)
K1_U_relay_ladder7 "DPDT" "AXICOM IM-G RELAY" 110.5,48.7 r0 top (schematic designator K1)
K1_U_relay_ladder8 "DPDT" "AXICOM IM-G RELAY" 110.5,35.5 r0 top (schematic designator K1)
K1_U_relay_ladder9 "DPDT" "AXICOM IM-G RELAY" 110.5,22.3 r0 top (schematic designator K1)
K1_U_relay_ladder10 "DPDT" "AXICOM IM-G RELAY" 110.5,9.1 r0 top (schematic designator K1)
K2_U_relay_ladder1 "DPDT" "AXICOM IM-G RELAY" 99.8,9.1 r0 bottom (schematic designator K2)
K2_U_relay_ladder2 "DPDT" "AXICOM IM-G RELAY" 99.8,22.3 r0 bottom (schematic designator K2)
K2_U_relay_ladder3 "DPDT" "AXICOM IM-G RELAY" 99.8,35.5 r0 bottom (schematic designator K2)
K2_U_relay_ladder4 "DPDT" "AXICOM IM-G RELAY" 99.8,48.7 r0 bottom (schematic designator K2)
K2_U_relay_ladder5 "DPDT" "AXICOM IM-G RELAY" 99.8,61.9 r0 bottom (schematic designator K2)
K2_U_relay_ladder6 "DPDT" "AXICOM IM-G RELAY" 99.8,61.9 r0 top (schematic designator K2)
K2_U_relay_ladder7 "DPDT" "AXICOM IM-G RELAY" 99.8,48.7 r0 top (schematic designator K2)
K2_U_relay_ladder8 "DPDT" "AXICOM IM-G RELAY" 99.8,35.5 r0 top (schematic designator K2)
K2_U_relay_ladder9 "DPDT" "AXICOM IM-G RELAY" 99.8,22.3 r0 top (schematic designator K2)
K2_U_relay_ladder10 "DPDT" "AXICOM IM-G RELAY" 99.8,9.1 r0 top (schematic designator K2)
K3_U_relay_ladder1 "DPDT" "AXICOM IM-G RELAY" 89.1,9.1 r0 bottom (schematic designator K3)
K3_U_relay_ladder2 "DPDT" "AXICOM IM-G RELAY" 89.1,22.3 r0 bottom (schematic designator K3)
K3_U_relay_ladder3 "DPDT" "AXICOM IM-G RELAY" 89.1,35.5 r0 bottom (schematic designator K3)
K3_U_relay_ladder4 "DPDT" "AXICOM IM-G RELAY" 89.1,48.7 r0 bottom (schematic designator K3)
K3_U_relay_ladder5 "DPDT" "AXICOM IM-G RELAY" 89.1,61.9 r0 bottom (schematic designator K3)
K3_U_relay_ladder6 "DPDT" "AXICOM IM-G RELAY" 89.1,61.9 r0 top (schematic designator K3)
K3_U_relay_ladder7 "DPDT" "AXICOM IM-G RELAY" 89.1,48.7 r0 top (schematic designator K3)
K3_U_relay_ladder8 "DPDT" "AXICOM IM-G RELAY" 89.1,35.5 r0 top (schematic designator K3)
K3_U_relay_ladder9 "DPDT" "AXICOM IM-G RELAY" 89.1,22.3 r0 top (schematic designator K3)
K3_U_relay_ladder10 "DPDT" "AXICOM IM-G RELAY" 89.1,9.1 r0 top (schematic designator K3)
K4_U_relay_ladder1 "DPDT" "AXICOM IM-G RELAY" 78.4,9.1 r0 bottom (schematic designator K4)
K4_U_relay_ladder2 "DPDT" "AXICOM IM-G RELAY" 78.4,22.3 r0 bottom (schematic designator K4)
K4_U_relay_ladder3 "DPDT" "AXICOM IM-G RELAY" 78.4,35.5 r0 bottom (schematic designator K4)
K4_U_relay_ladder4 "DPDT" "AXICOM IM-G RELAY" 78.4,48.7 r0 bottom (schematic designator K4)
K4_U_relay_ladder5 "DPDT" "AXICOM IM-G RELAY" 78.4,61.9 r0 bottom (schematic designator K4)
K4_U_relay_ladder6 "DPDT" "AXICOM IM-G RELAY" 78.4,61.9 r0 top (schematic designator K4)
K4_U_relay_ladder7 "DPDT" "AXICOM IM-G RELAY" 78.4,48.7 r0 top (schematic designator K4)
K4_U_relay_ladder8 "DPDT" "AXICOM IM-G RELAY" 78.4,35.5 r0 top (schematic designator K4)
K4_U_relay_ladder9 "DPDT" "AXICOM IM-G RELAY" 78.4,22.3 r0 top (schematic designator K4)
K4_U_relay_ladder10 "DPDT" "AXICOM IM-G RELAY" 78.4,9.1 r0 top (schematic designator K4)
K5_U_relay_ladder1 "DPDT" "AXICOM IM-G RELAY" 67.7,9.1 r0 bottom (schematic designator K5)
K5_U_relay_ladder2 "DPDT" "AXICOM IM-G RELAY" 67.7,22.3 r0 bottom (schematic designator K5)
K5_U_relay_ladder3 "DPDT" "AXICOM IM-G RELAY" 67.7,35.5 r0 bottom (schematic designator K5)
K5_U_relay_ladder4 "DPDT" "AXICOM IM-G RELAY" 67.7,48.7 r0 bottom (schematic designator K5)
K5_U_relay_ladder5 "DPDT" "AXICOM IM-G RELAY" 67.7,61.9 r0 bottom (schematic designator K5)
K5_U_relay_ladder6 "DPDT" "AXICOM IM-G RELAY" 67.7,61.9 r0 top (schematic designator K5)
K5_U_relay_ladder7 "DPDT" "AXICOM IM-G RELAY" 67.7,48.7 r0 top (schematic designator K5)
K5_U_relay_ladder8 "DPDT" "AXICOM IM-G RELAY" 67.7,35.5 r0 top (schematic designator K5)
K5_U_relay_ladder9 "DPDT" "AXICOM IM-G RELAY" 67.7,22.3 r0 top (schematic designator K5)
K5_U_relay_ladder10 "DPDT" "AXICOM IM-G RELAY" 67.7,9.1 r0 top (schematic designator K5)
K6_U_relay_ladder1 "DPDT" "AXICOM IM-G RELAY" 57,9.1 r0 bottom (schematic designator K6)
K6_U_relay_ladder2 "DPDT" "AXICOM IM-G RELAY" 57,22.3 r0 bottom (schematic designator K6)
K6_U_relay_ladder3 "DPDT" "AXICOM IM-G RELAY" 57,35.5 r0 bottom (schematic designator K6)
K6_U_relay_ladder4 "DPDT" "AXICOM IM-G RELAY" 57,48.7 r0 bottom (schematic designator K6)
K6_U_relay_ladder5 "DPDT" "AXICOM IM-G RELAY" 57,61.9 r0 bottom (schematic designator K6)
K6_U_relay_ladder6 "DPDT" "AXICOM IM-G RELAY" 57,61.9 r0 top (schematic designator K6)
K6_U_relay_ladder7 "DPDT" "AXICOM IM-G RELAY" 57,48.7 r0 top (schematic designator K6)
K6_U_relay_ladder8 "DPDT" "AXICOM IM-G RELAY" 57,35.5 r0 top (schematic designator K6)
K6_U_relay_ladder9 "DPDT" "AXICOM IM-G RELAY" 57,22.3 r0 top (schematic designator K6)
K6_U_relay_ladder10 "DPDT" "AXICOM IM-G RELAY" 57,9.1 r0 top (schematic designator K6)
K7_U_relay_ladder1 "DPDT" "AXICOM IM-G RELAY" 46.3,9.1 r0 bottom (schematic designator K7)
K7_U_relay_ladder2 "DPDT" "AXICOM IM-G RELAY" 46.3,22.3 r0 bottom (schematic designator K7)
K7_U_relay_ladder3 "DPDT" "AXICOM IM-G RELAY" 46.3,35.5 r0 bottom (schematic designator K7)
K7_U_relay_ladder4 "DPDT" "AXICOM IM-G RELAY" 46.3,48.7 r0 bottom (schematic designator K7)
K7_U_relay_ladder5 "DPDT" "AXICOM IM-G RELAY" 46.3,61.9 r0 bottom (schematic designator K7)
K7_U_relay_ladder6 "DPDT" "AXICOM IM-G RELAY" 46.3,61.9 r0 top (schematic designator K7)
K7_U_relay_ladder7 "DPDT" "AXICOM IM-G RELAY" 46.3,48.7 r0 top (schematic designator K7)
K7_U_relay_ladder8 "DPDT" "AXICOM IM-G RELAY" 46.3,35.5 r0 top (schematic designator K7)
K7_U_relay_ladder9 "DPDT" "AXICOM IM-G RELAY" 46.3,22.3 r0 top (schematic designator K7)
K7_U_relay_ladder10 "DPDT" "AXICOM IM-G RELAY" 46.3,9.1 r0 top (schematic designator K7)
K8_U_relay_ladder1 "DPDT" "AXICOM IM-G RELAY" 35.6,9.1 r0 bottom (schematic designator K8)
K8_U_relay_ladder2 "DPDT" "AXICOM IM-G RELAY" 35.6,22.3 r0 bottom (schematic designator K8)
K8_U_relay_ladder3 "DPDT" "AXICOM IM-G RELAY" 35.6,35.5 r0 bottom (schematic designator K8)
K8_U_relay_ladder4 "DPDT" "AXICOM IM-G RELAY" 35.6,48.7 r0 bottom (schematic designator K8)
K8_U_relay_ladder5 "DPDT" "AXICOM IM-G RELAY" 35.6,61.9 r0 bottom (schematic designator K8)
K8_U_relay_ladder6 "DPDT" "AXICOM IM-G RELAY" 35.6,61.9 r0 top (schematic designator K8)
K8_U_relay_ladder7 "DPDT" "AXICOM IM-G RELAY" 35.6,48.7 r0 top (schematic designator K8)
K8_U_relay_ladder8 "DPDT" "AXICOM IM-G RELAY" 35.6,35.5 r0 top (schematic designator K8)
K8_U_relay_ladder9 "DPDT" "AXICOM IM-G RELAY" 35.6,22.3 r0 top (schematic designator K8)
K8_U_relay_ladder10 "DPDT" "AXICOM IM-G RELAY" 35.6,9.1 r0 top (schematic designator K8)
LD1 "NCP115 3.3V" TSOP95P280X110-6L 4.5,37.2 r270 top
MCP1 "MCP32017" "MCP23017 QFN" 18.575,10.6 r270 top
MCP2 "MCP32017" "MCP23017 QFN" 18.575,37 r270 top
MCP3 "MCP32017" "MCP23017 QFN" 18.575,63.35 r270 top
MCP4 "MCP32017" "MCP23017 QFN" 18.575,50.15 r270 top
MCP5 "MCP32017" "MCP23017 QFN" 18.575,23.75 r270 top
P1 "Input" "1.27mm SMD conn" 9.8,60.7 r180 top
P2 "Output" "1.27mm SMD conn" 8.675,9.995 r180 top
P3 "Header 10X2" HDR2X10 127,4.44 r90 top
P4 "Header 5" HDR1X5 1.4,31.1 r90 top
P5 "Header 5" HDR1X5 1.4,44.2 r90 top
P6 "Header 10X2" HDR2X10 127,33.5 r90 top
R1 "10k" R1005_0402i_L 2.187,15.121 r0 top
R2 "10k" R1005_0402i_L 2.187,14.208 r0 top
R3 "120" R1005_0402i_L 8.4,13.9 r180 top
R4 "100k" R1005_0402i_L 1.6,9.5 r0 top
R5_U_relay_ladder1 "R/2" R2012_0805I_L 113.45,14.4 r180 bottom (schematic designator R5)
R5_U_relay_ladder2 "R/2" R2012_0805I_L 113.45,27.6 r180 bottom (schematic designator R5)
R5_U_relay_ladder3 "R/2" R2012_0805I_L 113.45,40.8 r180 bottom (schematic designator R5)
R5_U_relay_ladder4 "R/2" R2012_0805I_L 113.45,54 r180 bottom (schematic designator R5)
R5_U_relay_ladder5 "R/2" R2012_0805I_L 113.45,67.2 r180 bottom (schematic designator R5)
R5_U_relay_ladder6 "R/2" R2012_0805I_L 113.45,56.6 r180 top (schematic designator R5)
R5_U_relay_ladder7 "R/2" R2012_0805I_L 113.45,43.4 r180 top (schematic designator R5)
R5_U_relay_ladder8 "R/2" R2012_0805I_L 113.45,30.2 r180 top (schematic designator R5)
R5_U_relay_ladder9 "R/2" R2012_0805I_L 113.45,17 r180 top (schematic designator R5)
R5_U_relay_ladder10 "R/2" R2012_0805I_L 113.45,3.8 r180 top (schematic designator R5)
R6_U_relay_ladder1 "R/4" R2012_0805I_L 102.75,14.4 r180 bottom (schematic designator R6)
R6_U_relay_ladder2 "R/4" R2012_0805I_L 102.75,27.6 r180 bottom (schematic designator R6)
R6_U_relay_ladder3 "R/4" R2012_0805I_L 102.75,40.8 r180 bottom (schematic designator R6)
R6_U_relay_ladder4 "R/4" R2012_0805I_L 102.75,54 r180 bottom (schematic designator R6)
R6_U_relay_ladder5 "R/4" R2012_0805I_L 102.75,67.2 r180 bottom (schematic designator R6)
R6_U_relay_ladder6 "R/4" R2012_0805I_L 102.75,56.6 r180 top (schematic designator R6)
R6_U_relay_ladder7 "R/4" R2012_0805I_L 102.75,43.4 r180 top (schematic designator R6)
R6_U_relay_ladder8 "R/4" R2012_0805I_L 102.75,30.2 r180 top (schematic designator R6)
R6_U_relay_ladder9 "R/4" R2012_0805I_L 102.75,17 r180 top (schematic designator R6)
R6_U_relay_ladder10 "R/4" R2012_0805I_L 102.75,3.8 r180 top (schematic designator R6)
R7_U_relay_ladder1 "R/8" R2012_0805I_L 92.05,14.4 r180 bottom (schematic designator R7)
R7_U_relay_ladder2 "R/8" R2012_0805I_L 92.05,27.6 r180 bottom (schematic designator R7)
R7_U_relay_ladder3 "R/8" R2012_0805I_L 92.05,40.8 r180 bottom (schematic designator R7)
R7_U_relay_ladder4 "R/8" R2012_0805I_L 92.05,54 r180 bottom (schematic designator R7)
R7_U_relay_ladder5 "R/8" R2012_0805I_L 92.05,67.2 r180 bottom (schematic designator R7)
R7_U_relay_ladder6 "R/8" R2012_0805I_L 92.05,56.6 r180 top (schematic designator R7)
R7_U_relay_ladder7 "R/8" R2012_0805I_L 92.05,43.4 r180 top (schematic designator R7)
R7_U_relay_ladder8 "R/8" R2012_0805I_L 92.05,30.2 r180 top (schematic designator R7)
R7_U_relay_ladder9 "R/8" R2012_0805I_L 92.05,17 r180 top (schematic designator R7)
R7_U_relay_ladder10 "R/8" R2012_0805I_L 92.05,3.8 r180 top (schematic designator R7)
R8_U_relay_ladder1 "R/16" R2012_0805I_L 81.35,14.4 r180 bottom (schematic designator R8)
R8_U_relay_ladder2 "R/16" R2012_0805I_L 81.35,27.6 r180 bottom (schematic designator R8)
R8_U_relay_ladder3 "R/16" R2012_0805I_L 81.35,40.8 r180 bottom (schematic designator R8)
R8_U_relay_ladder4 "R/16" R2012_0805I_L 81.35,54 r180 bottom (schematic designator R8)
R8_U_relay_ladder5 "R/16" R2012_0805I_L 81.35,67.2 r180 bottom (schematic designator R8)
R8_U_relay_ladder6 "R/16" R2012_0805I_L 81.35,56.6 r180 top (schematic designator R8)
R8_U_relay_ladder7 "R/16" R2012_0805I_L 81.35,43.4 r180 top (schematic designator R8)
R8_U_relay_ladder8 "R/16" R2012_0805I_L 81.35,30.2 r180 top (schematic designator R8)
R8_U_relay_ladder9 "R/16" R2012_0805I_L 81.35,17 r180 top (schematic designator R8)
R8_U_relay_ladder10 "R/16" R2012_0805I_L 81.35,3.8 r180 top (schematic designator R8)
R9_U_relay_ladder1 "R/32" R2012_0805I_L 70.65,14.4 r180 bottom (schematic designator R9)
R9_U_relay_ladder2 "R/32" R2012_0805I_L 70.65,27.6 r180 bottom (schematic designator R9)
R9_U_relay_ladder3 "R/32" R2012_0805I_L 70.65,40.8 r180 bottom (schematic designator R9)
R9_U_relay_ladder4 "R/32" R2012_0805I_L 70.65,54 r180 bottom (schematic designator R9)
R9_U_relay_ladder5 "R/32" R2012_0805I_L 70.65,67.2 r180 bottom (schematic designator R9)
R9_U_relay_ladder6 "R/32" R2012_0805I_L 70.65,56.6 r180 top (schematic designator R9)
R9_U_relay_ladder7 "R/32" R2012_0805I_L 70.65,43.4 r180 top (schematic designator R9)
R9_U_relay_ladder8 "R/32" R2012_0805I_L 70.65,30.2 r180 top (schematic designator R9)
R9_U_relay_ladder9 "R/32" R2012_0805I_L 70.65,17 r180 top (schematic designator R9)
R9_U_relay_ladder10 "R/32" R2012_0805I_L 70.65,3.8 r180 top (schematic designator R9)
R10_U_relay_ladder1 "R/64" R2012_0805I_L 59.95,14.4 r180 bottom (schematic designator R10)
R10_U_relay_ladder2 "R/64" R2012_0805I_L 59.95,27.6 r180 bottom (schematic designator R10)
R10_U_relay_ladder3 "R/64" R2012_0805I_L 59.95,40.8 r180 bottom (schematic designator R10)
R10_U_relay_ladder4 "R/64" R2012_0805I_L 59.95,54 r180 bottom (schematic designator R10)
R10_U_relay_ladder5 "R/64" R2012_0805I_L 59.95,67.2 r180 bottom (schematic designator R10)
R10_U_relay_ladder6 "R/64" R2012_0805I_L 59.95,56.6 r180 top (schematic designator R10)
R10_U_relay_ladder7 "R/64" R2012_0805I_L 59.95,43.4 r180 top (schematic designator R10)
R10_U_relay_ladder8 "R/64" R2012_0805I_L 59.95,30.2 r180 top (schematic designator R10)
R10_U_relay_ladder9 "R/64" R2012_0805I_L 59.95,17 r180 top (schematic designator R10)
R10_U_relay_ladder10 "R/64" R2012_0805I_L 59.95,3.8 r180 top (schematic designator R10)
R11_U_relay_ladder1 "R/128" R2012_0805I_L 49.25,14.4 r180 bottom (schematic designator R11)
R11_U_relay_ladder2 "R/128" R2012_0805I_L 49.25,27.6 r180 bottom (schematic designator R11)
R11_U_relay_ladder3 "R/128" R2012_0805I_L 49.25,40.8 r180 bottom (schematic designator R11)
R11_U_relay_ladder4 "R/128" R2012_0805I_L 49.25,54 r180 bottom (schematic designator R11)
R11_U_relay_ladder5 "R/128" R2012_0805I_L 49.25,67.2 r180 bottom (schematic designator R11)
R11_U_relay_ladder6 "R/128" R2012_0805I_L 49.25,56.6 r180 top (schematic designator R11)
R11_U_relay_ladder7 "R/128" R2012_0805I_L 49.25,43.4 r180 top (schematic designator R11)
R11_U_relay_ladder8 "R/128" R2012_0805I_L 49.25,30.2 r180 top (schematic designator R11)
R11_U_relay_ladder9 "R/128" R2012_0805I_L 49.25,17 r180 top (schematic designator R11)
R11_U_relay_ladder10 "R/128" R2012_0805I_L 49.25,3.8 r180 top (schematic designator R11)
R12_U_relay_ladder1 "R/256" R2012_0805I_L 38.55,14.4 r180 bottom (schematic designator R12)
R12_U_relay_ladder2 "R/256" R2012_0805I_L 38.55,27.6 r180 bottom (schematic designator R12)
R12_U_relay_ladder3 "R/256" R2012_0805I_L 38.55,40.8 r180 bottom (schematic designator R12)
R12_U_relay_ladder4 "R/256" R2012_0805I_L 38.55,54 r180 bottom (schematic designator R12)
R12_U_relay_ladder5 "R/256" R2012_0805I_L 38.55,67.2 r180 bottom (schematic designator R12)
R12_U_relay_ladder6 "R/256" R2012_0805I_L 38.55,56.6 r180 top (schematic designator R12)
R12_U_relay_ladder7 "R/256" R2012_0805I_L 38.55,43.4 r180 top (schematic designator R12)
R12_U_relay_ladder8 "R/256" R2012_0805I_L 38.55,30.2 r180 top (schematic designator R12)
R12_U_relay_ladder9 "R/256" R2012_0805I_L 38.55,17 r180 top (schematic designator R12)
R12_U_relay_ladder10 "R/256" R2012_0805I_L 38.55,3.8 r180 top (schematic designator R12)
R13_U_relay_ladder1 "R/2" R2012_0805I_L 110.75,3.8 r180 bottom (schematic designator R13)
R13_U_relay_ladder2 "R/2" R2012_0805I_L 110.75,17 r180 bottom (schematic designator R13)
R13_U_relay_ladder3 "R/2" R2012_0805I_L 110.75,30.2 r180 bottom (schematic designator R13)
R13_U_relay_ladder4 "R/2" R2012_0805I_L 110.75,43.4 r180 bottom (schematic designator R13)
R13_U_relay_ladder5 "R/2" R2012_0805I_L 110.75,56.6 r180 bottom (schematic designator R13)
R13_U_relay_ladder6 "R/2" R2012_0805I_L 110.75,67.2 r180 top (schematic designator R13)
R13_U_relay_ladder7 "R/2" R2012_0805I_L 110.75,54 r180 top (schematic designator R13)
R13_U_relay_ladder8 "R/2" R2012_0805I_L 110.75,40.8 r180 top (schematic designator R13)
R13_U_relay_ladder9 "R/2" R2012_0805I_L 110.75,27.6 r180 top (schematic designator R13)
R13_U_relay_ladder10 "R/2" R2012_0805I_L 110.75,14.4 r180 top (schematic designator R13)
R14_U_relay_ladder1 "R/4" R2012_0805I_L 100.05,3.8 r180 bottom (schematic designator R14)
R14_U_relay_ladder2 "R/4" R2012_0805I_L 100.05,17 r180 bottom (schematic designator R14)
R14_U_relay_ladder3 "R/4" R2012_0805I_L 100.05,30.2 r180 bottom (schematic designator R14)
R14_U_relay_ladder4 "R/4" R2012_0805I_L 100.05,43.4 r180 bottom (schematic designator R14)
R14_U_relay_ladder5 "R/4" R2012_0805I_L 100.05,56.6 r180 bottom (schematic designator R14)
R14_U_relay_ladder6 "R/4" R2012_0805I_L 100.05,67.2 r180 top (schematic designator R14)
R14_U_relay_ladder7 "R/4" R2012_0805I_L 100.05,54 r180 top (schematic designator R14)
R14_U_relay_ladder8 "R/4" R2012_0805I_L 100.05,40.8 r180 top (schematic designator R14)
R14_U_relay_ladder9 "R/4" R2012_0805I_L 100.05,27.6 r180 top (schematic designator R14)
R14_U_relay_ladder10 "R/4" R2012_0805I_L 100.05,14.4 r180 top (schematic designator R14)
R15_U_relay_ladder1 "R/8" R2012_0805I_L 89.4,3.8 r180 bottom (schematic designator R15)
R15_U_relay_ladder2 "R/8" R2012_0805I_L 89.4,17 r180 bottom (schematic designator R15)
R15_U_relay_ladder3 "R/8" R2012_0805I_L 89.4,30.2 r180 bottom (schematic designator R15)
R15_U_relay_ladder4 "R/8" R2012_0805I_L 89.4,43.4 r180 bottom (schematic designator R15)
R15_U_relay_ladder5 "R/8" R2012_0805I_L 89.4,56.6 r180 bottom (schematic designator R15)
R15_U_relay_ladder6 "R/8" R2012_0805I_L 89.4,67.2 r180 top (schematic designator R15)
R15_U_relay_ladder7 "R/8" R2012_0805I_L 89.4,54 r180 top (schematic designator R15)
R15_U_relay_ladder8 "R/8" R2012_0805I_L 89.4,40.8 r180 top (schematic designator R15)
R15_U_relay_ladder9 "R/8" R2012_0805I_L 89.4,27.6 r180 top (schematic designator R15)
R15_U_relay_ladder10 "R/8" R2012_0805I_L 89.4,14.4 r180 top (schematic designator R15)
R16_U_relay_ladder1 "R/16" R2012_0805I_L 78.65,3.8 r180 bottom (schematic designator R16)
R16_U_relay_ladder2 "R/16" R2012_0805I_L 78.65,17 r180 bottom (schematic designator R16)
R16_U_relay_ladder3 "R/16" R2012_0805I_L 78.65,30.2 r180 bottom (schematic designator R16)
R16_U_relay_ladder4 "R/16" R2012_0805I_L 78.65,43.4 r180 bottom (schematic designator R16)
R16_U_relay_ladder5 "R/16" R2012_0805I_L 78.65,56.6 r180 bottom (schematic designator R16)
R16_U_relay_ladder6 "R/16" R2012_0805I_L 78.65,67.2 r180 top (schematic designator R16)
R16_U_relay_ladder7 "R/16" R2012_0805I_L 78.65,54 r180 top (schematic designator R16)
R16_U_relay_ladder8 "R/16" R2012_0805I_L 78.65,40.8 r180 top (schematic designator R16)
R16_U_relay_ladder9 "R/16" R2012_0805I_L 78.65,27.6 r180 top (schematic designator R16)
R16_U_relay_ladder10 "R/16" R2012_0805I_L 78.65,14.4 r180 top (schematic designator R16)
R17_U_relay_ladder1 "R/32" R2012_0805I_L 67.95,3.8 r180 bottom (schematic designator R17)
R17_U_relay_ladder2 "R/32" R2012_0805I_L 67.95,17 r180 bottom (schematic designator R17)
R17_U_relay_ladder3 "R/32" R2012_0805I_L 67.95,30.2 r180 bottom (schematic designator R17)
R17_U_relay_ladder4 "R/32" R2012_0805I_L 67.95,43.4 r180 bottom (schematic designator R17)
R17_U_relay_ladder5 "R/32" R2012_0805I_L 67.95,56.6 r180 bottom (schematic designator R17)
R17_U_relay_ladder6 "R/32" R2012_0805I_L 67.95,67.2 r180 top (schematic designator R17)
R17_U_relay_ladder7 "R/32" R2012_0805I_L 67.95,54 r180 top (schematic designator R17)
R17_U_relay_ladder8 "R/32" R2012_0805I_L 67.95,40.8 r180 top (schematic designator R17)
R17_U_relay_ladder9 "R/32" R2012_0805I_L 67.95,27.6 r180 top (schematic designator R17)
R17_U_relay_ladder10 "R/32" R2012_0805I_L 67.95,14.4 r180 top (schematic designator R17)
R18_U_relay_ladder1 "R/64" R2012_0805I_L 57.25,3.8 r180 bottom (schematic designator R18)
R18_U_relay_ladder2 "R/64" R2012_0805I_L 57.25,17 r180 bottom (schematic designator R18)
R18_U_relay_ladder3 "R/64" R2012_0805I_L 57.25,30.2 r180 bottom (schematic designator R18)
R18_U_relay_ladder4 "R/64" R2012_0805I_L 57.25,43.4 r180 bottom (schematic designator R18)
R18_U_relay_ladder5 "R/64" R2012_0805I_L 57.25,56.6 r180 bottom (schematic designator R18)
R18_U_relay_ladder6 "R/64" R2012_0805I_L 57.25,67.2 r180 top (schematic designator R18)
R18_U_relay_ladder7 "R/64" R2012_0805I_L 57.25,54 r180 top (schematic designator R18)
R18_U_relay_ladder8 "R/64" R2012_0805I_L 57.25,40.8 r180 top (schematic designator R18)
R18_U_relay_ladder9 "R/64" R2012_0805I_L 57.25,27.6 r180 top (schematic designator R18)
R18_U_relay_ladder10 "R/64" R2012_0805I_L 57.25,14.4 r180 top (schematic designator R18)
R19_U_relay_ladder1 "R/128" R2012_0805I_L 46.55,3.8 r180 bottom (schematic designator R19)
R19_U_relay_ladder2 "R/128" R2012_0805I_L 46.55,17 r180 bottom (schematic designator R19)
R19_U_relay_ladder3 "R/128" R2012_0805I_L 46.55,30.2 r180 bottom (schematic designator R19)
R19_U_relay_ladder4 "R/128" R2012_0805I_L 46.55,43.4 r180 bottom (schematic designator R19)
R19_U_relay_ladder5 "R/128" R2012_0805I_L 46.55,56.6 r180 bottom (schematic designator R19)
R19_U_relay_ladder6 "R/128" R2012_0805I_L 46.55,67.2 r180 top (schematic designator R19)
R19_U_relay_ladder7 "R/128" R2012_0805I_L 46.55,54 r180 top (schematic designator R19)
R19_U_relay_ladder8 "R/128" R2012_0805I_L 46.55,40.8 r180 top (schematic designator R19)
R19_U_relay_ladder9 "R/128" R2012_0805I_L 46.55,27.6 r180 top (schematic designator R19)
R19_U_relay_ladder10 "R/128" R2012_0805I_L 46.55,14.4 r180 top (schematic designator R19)
R20_U_relay_ladder1 "R/256" R2012_0805I_L 35.85,3.8 r180 bottom (schematic designator R20)
R20_U_relay_ladder2 "R/256" R2012_0805I_L 35.85,17 r180 bottom (schematic designator R20)
R20_U_relay_ladder3 "R/256" R2012_0805I_L 35.85,30.2 r180 bottom (schematic designator R20)
R20_U_relay_ladder4 "R/256" R2012_0805I_L 35.85,43.4 r180 bottom (schematic designator R20)
R20_U_relay_ladder5 "R/256" R2012_0805I_L 35.85,56.6 r180 bottom (schematic designator R20)
R20_U_relay_ladder6 "R/256" R2012_0805I_L 35.85,67.2 r180 top (schematic designator R20)
R20_U_relay_ladder7 "R/256" R2012_0805I_L 35.85,54 r180 top (schematic designator R20)
R20_U_relay_ladder8 "R/256" R2012_0805I_L 35.85,40.8 r180 top (schematic designator R20)
R20_U_relay_ladder9 "R/256" R2012_0805I_L 35.85,27.6 r180 top (schematic designator R20)
R20_U_relay_ladder10 "R/256" R2012_0805I_L 35.85,14.4 r180 top (schematic designator R20)
R21 "100k" R1005_0402i_L 16,5.9 r180 top
R22 "100k" R1005_0402i_L 16,32.3 r180 top
R23 "100k" R1005_0402i_L 16,58.6 r180 top
R24 "100k" R1005_0402i_L 16,45.4 r180 top
R25 "100k" R1005_0402i_L 16,19.1 r180 top
TP1 "PAD" PAD_CIRC_HOLE 117.3,7.6 r90 top
TP2 "PAD" PAD_CIRC_HOLE 117.1,20.4 r90 top
TP3 "PAD" PAD_CIRC_HOLE 117.4,33.4 r90 top
TP4 "PAD" PAD_CIRC_HOLE 117.4,46.7 r90 top
TP5 "PAD" PAD_CIRC_HOLE 117.4,60.5 r90 top
TP6 "PAD" PAD_CIRC_HOLE 117.1,66.3 r90 top
TP7 "PAD" PAD_CIRC_HOLE 117.6,52.5 r90 top
TP8 "PAD" PAD_CIRC_HOLE 117.6,39.8 r90 top
TP9 "PAD" PAD_CIRC_HOLE 117.1,23.6 r90 top
TP10 "PAD" PAD_CIRC_HOLE 117.3,10.6 r90 top
ULN1 "ULN2803" QFN127P600-8N 26.475,6.3 r0 top
ULN2 "ULN2803" QFN127P600-8N 26.475,19.5 r0 top
ULN3 "ULN2803" QFN127P600-8N 26.475,32.7 r0 top
ULN4 "ULN2803" QFN127P600-8N 26.475,45.9 r0 top
ULN5 "ULN2803" QFN127P600-8N 26.475,59.1 r0 top
ULN6 "ULN2803" QFN127P600-8N 26.475,65.2 r0 top
ULN7 "ULN2803" QFN127P600-8N 26.475,52 r0 top
ULN8 "ULN2803" QFN127P600-8N 26.475,38.8 r0 top
ULN9 "ULN2803" QFN127P600-8N 26.475,25.6 r0 top
ULN10 "ULN2803" QFN127P600-8N 26.475,12.4 r0 top
X1 "PTS636_SM25_SMTR_LFS" PTS636SM25SMTRLFS 3.5,22.575 r270 top

## Footprints (in the part's own frame and the unit in brackets; to place one, negate y for a bottom-side part, rotate by r counter-clockwise, add the part's x,y. Pads: shape width x height; smd on the part's side, far side on the other; paste and mask are expansions set on the pad)
"1.27mm SMD conn" [mm]
  rect 0.76x2.4 smd: 1(3.175,1.905) 2(3.175,-1.905) 3(1.905,1.905) 4(1.905,-1.905) 5(0.635,1.905) 6(0.635,-1.905) 7(-0.635,1.905) 8(-0.635,-1.905) 9(-1.905,1.905) 10(-1.905,-1.905) 11(-3.175,1.905) 12(-3.175,-1.905)
"AXICOM IM-G RELAY" [mm] "TE CONNECTIVITY AXICOM IM-G (Gull wings) Relay SMD"
  rect 0.7x2 smd: 1(-3.797,-3.2) 2(-0.597,-3.2) 3(1.6,-3.2) 4(3.797,-3.2) 5(3.797,3.2) 6(1.6,3.2) 7(-0.597,3.2) 8(-3.797,3.2)
  silkscreen extent -5,-3 5,3
C1608_0603I_L [mm] "Chip Capacitor, 2-Leads, Body 1.57x0.85mm, IPC High Density"
  rect 0.72x0.9 smd: 1(-0.6,0) 2(0.6,0)
  body extent -0.83,-0.48 0.83,0.48, height 0.95
"C AlElko 5x11 R2" [mm]
  round 1.27 hole 0.711: 1(1,0) 2(-1,0)
  silkscreen extent -2.5,-2.5 2.5,2.5, body extent -2.5,-2.5 2.5,2.5, height 11.01
HDR1X5 [mm] "Connector; Header; 5 Position"
  rect 1.5x1.5 hole 0.9: 1(0,0)
  round 1.5 hole 0.9: 2(2.54,0) 3(5.08,0) 4(7.62,0) 5(10.16,0)
  silkscreen extent -1.27,-1.27 11.43,1.27
HDR2X10 [mm] "Connector; Header; 10x2 Position"
  rect 1.5x1.5 hole 0.9: 1(0,0)
  round 1.5 hole 0.9: 2(0,2.54) 3(2.54,0) 4(2.54,2.54) 5(5.08,0) 6(5.08,2.54) 7(7.62,0) 8(7.62,2.54) 9(10.16,0) 10(10.16,2.54) 11(12.7,0) 12(12.7,2.54) 13(15.24,0) 14(15.24,2.54) 15(17.78,0) 16(17.78,2.54) 17(20.32,0) 18(20.32,2.54) 19(22.86,0) 20(22.86,2.54)
  silkscreen extent -1.27,-1.27 24.13,3.81
"MCP23017 QFN" [mm] "QFN, 28-Leads, Body 6,00x6,00mm, Pitch 0,65mm, Thermal Pad 3,93x3,93mm, IPC High Density"
  oval 1x0.3 smd: 1(-2.725,1.95) 2(-2.725,1.3) 3(-2.725,0.65) 4(-2.725,0) 5(-2.725,-0.65) 6(-2.725,-1.3) 7(-2.725,-1.95) 15(2.725,-1.95) 16(2.725,-1.3) 17(2.725,-0.65) 18(2.725,0) 19(2.725,0.65) 20(2.725,1.3) 21(2.725,1.95)
  oval 0.3x1 smd: 8(-1.95,-2.725) 9(-1.3,-2.725) 10(-0.65,-2.725) 11(0,-2.725) 12(0.65,-2.725) 13(1.3,-2.725) 14(1.95,-2.725) 22(1.95,2.725) 23(1.3,2.725) 24(0.65,2.725) 25(0,2.725) 26(-0.65,2.725) 27(-1.3,2.725) 28(-1.95,2.725)
  rect 3.93x3.93 smd: 29(0,0)
  silkscreen extent -3.92,-3.15 3.15,3.15, body extent -3,-3 3,3, height 0.9
PAD_CIRC_HOLE [mil]
  round 74 hole 39.4: 1(0,0)
PTS636SM25SMTRLFS [mm]
  rect 1.25x1 smd: 1(-3.875,0) 2(3.875,0)
  silkscreen extent -5.3,-1.85 3.05,1.85
QFN50P400X400X60-28N-D [mm]
  rect 0.6x0.3 smd: 1(-2.1,1.5) 2(-2.1,1) 3(-2.1,0.5) 4(-2.1,0) 5(-2.1,-0.5) 6(-2.1,-1) 7(-2.1,-1.5) 15(2.1,-1.5) 16(2.1,-1) 17(2.1,-0.5) 18(2.1,0) 19(2.1,0.5) 20(2.1,1) 21(2.1,1.5)
  rect 0.3x0.6 smd: 8(-1.5,-2.1) 9(-1,-2.1) 10(-0.5,-2.1) 11(0,-2.1) 12(0.5,-2.1) 13(1,-2.1) 14(1.5,-2.1) 22(1.5,2.1) 23(1,2.1) 24(0.5,2.1) 25(0,2.1) 26(-0.5,2.1) 27(-1,2.1) 28(-1.5,2.1)
  silkscreen extent -2.67,-2.67 2.67,2.67
QFN127P600-8N [mm]
  oval 0.85x0.25 smd: 1(-1.825,1) 2(-1.825,0.5) 3(-1.825,0) 4(-1.825,-0.5) 5(-1.825,-1) 11(1.825,-1) 12(1.825,-0.5) 13(1.825,0) 14(1.825,0.5) 15(1.825,1)
  oval 0.25x0.85 smd: 6(-1,-1.825) 7(-0.5,-1.825) 8(0,-1.825) 9(0.5,-1.825) 10(1,-1.825) 16(1,1.825) 17(0.5,1.825) 18(0,1.825) 19(-0.5,1.825) 20(-1,1.825)
  rect 2.3x2.3 smd: 21(0,0)
  silkscreen extent -2.97,-2.2 2.2,2.2, body extent -2.05,-2.05 2.05,2.05, height 0.8
R1005_0402i_L [mm] "Resistor, Chip; 1.00 mm L X 0.50 mm W X 0.40 mm H body"
  rrect50% 0.52x0.56 smd: 1(-0.44,0) 2(0.44,0)
  body extent -0.5,-0.25 0.5,0.25, height 0.4
R2012_0805I_L [mm] "Chip Resistor, 2-Leads, Body 2.05x1.25mm, IPC High Density"
  rect 0.8x1.3 smd: 1(-0.85,0) 2(0.85,0)
  silkscreen extent -0.05,-0.55 0.05,0.55, body extent -1.1,-0.7 1.1,0.7, height 0.8
SOLDER_JUMPER_SQUARE [mm]
  rect 0.7x0.762 smd paste+0 mask+0: 1(0.45,0) 2(-0.45,0)
  Top Layer region: -0.179,-0.508
SOLDER_JUMPER_TRIANGLE [mil]
  rect 15x30 smd paste+0 mask+0: 1(45,20) 2(-10,20)
  Top Layer region: 5,20 25,40 -20,40 -20,0 25,0
  Top Layer region: 55,40 35,40 15,20 35,0 55,0
  Top Layer region: 3.94,0
SON50P300X300X80-11N-D [mm]
  rect 0.85x0.3 smd: 1(-1.45,1) 2(-1.45,0.5) 3(-1.45,0) 4(-1.45,-0.5) 5(-1.45,-1) 6(1.45,-1) 7(1.45,-0.5) 8(1.45,0) 9(1.45,0.5) 10(1.45,1)
  rect 1.7x2.4 smd: 11(0,0)
  silkscreen extent -2,1.53 -1.75,1.78
TSOP95P280X110-6L [mm] "TSOP, 6-Leads, Body 2,87x1,50mm, Pitch 0,95mm, IPC High Density"
  rect 0.8x0.55 smd: 1(-1.25,0.95) 2(-1.25,0) 3(-1.25,-0.95) 4(1.25,-0.95) 5(1.25,0.95)
  silkscreen extent -1.37,-1.6 0.45,1.9, body extent -1.38,-1.6 1.38,1.6, height 1.1